# Altium PCB RevisedPGBoard.PcbDoc
Units mm, origin at the board's own origin, x right, y up, seen from the top; angles counter-clockwise.
Board outline 135.38 x 119.51 mm, 4 copper layers (Top Layer, GND Plane, PWR Plane, Bottom Layer), stack 0.603 mm thick; 132 components, 103 nets, 537 pads, 118 vias.
Unrouted connection lines stored in the file: 11.
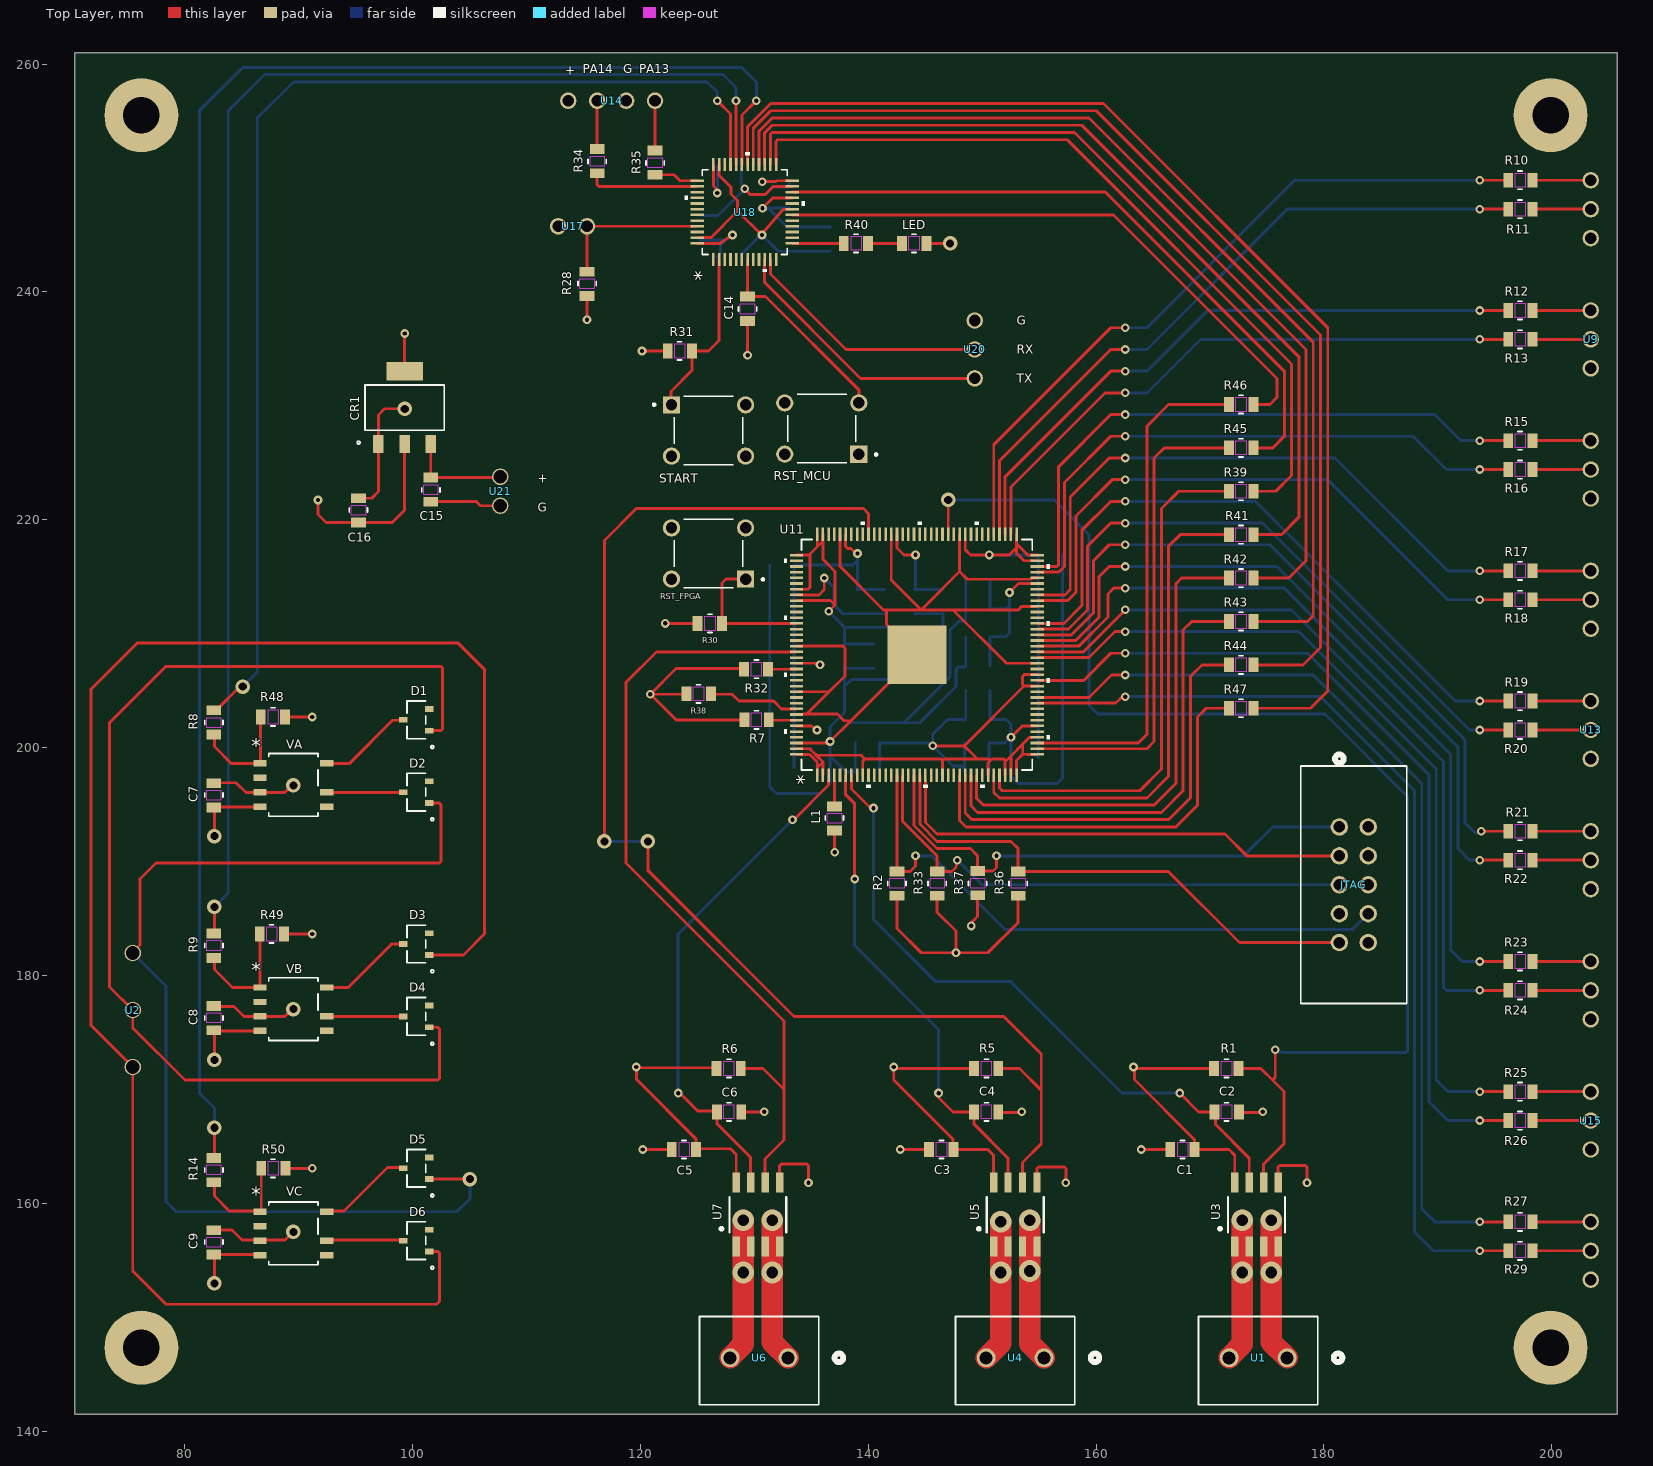
[diagram p0: Top Layer view]
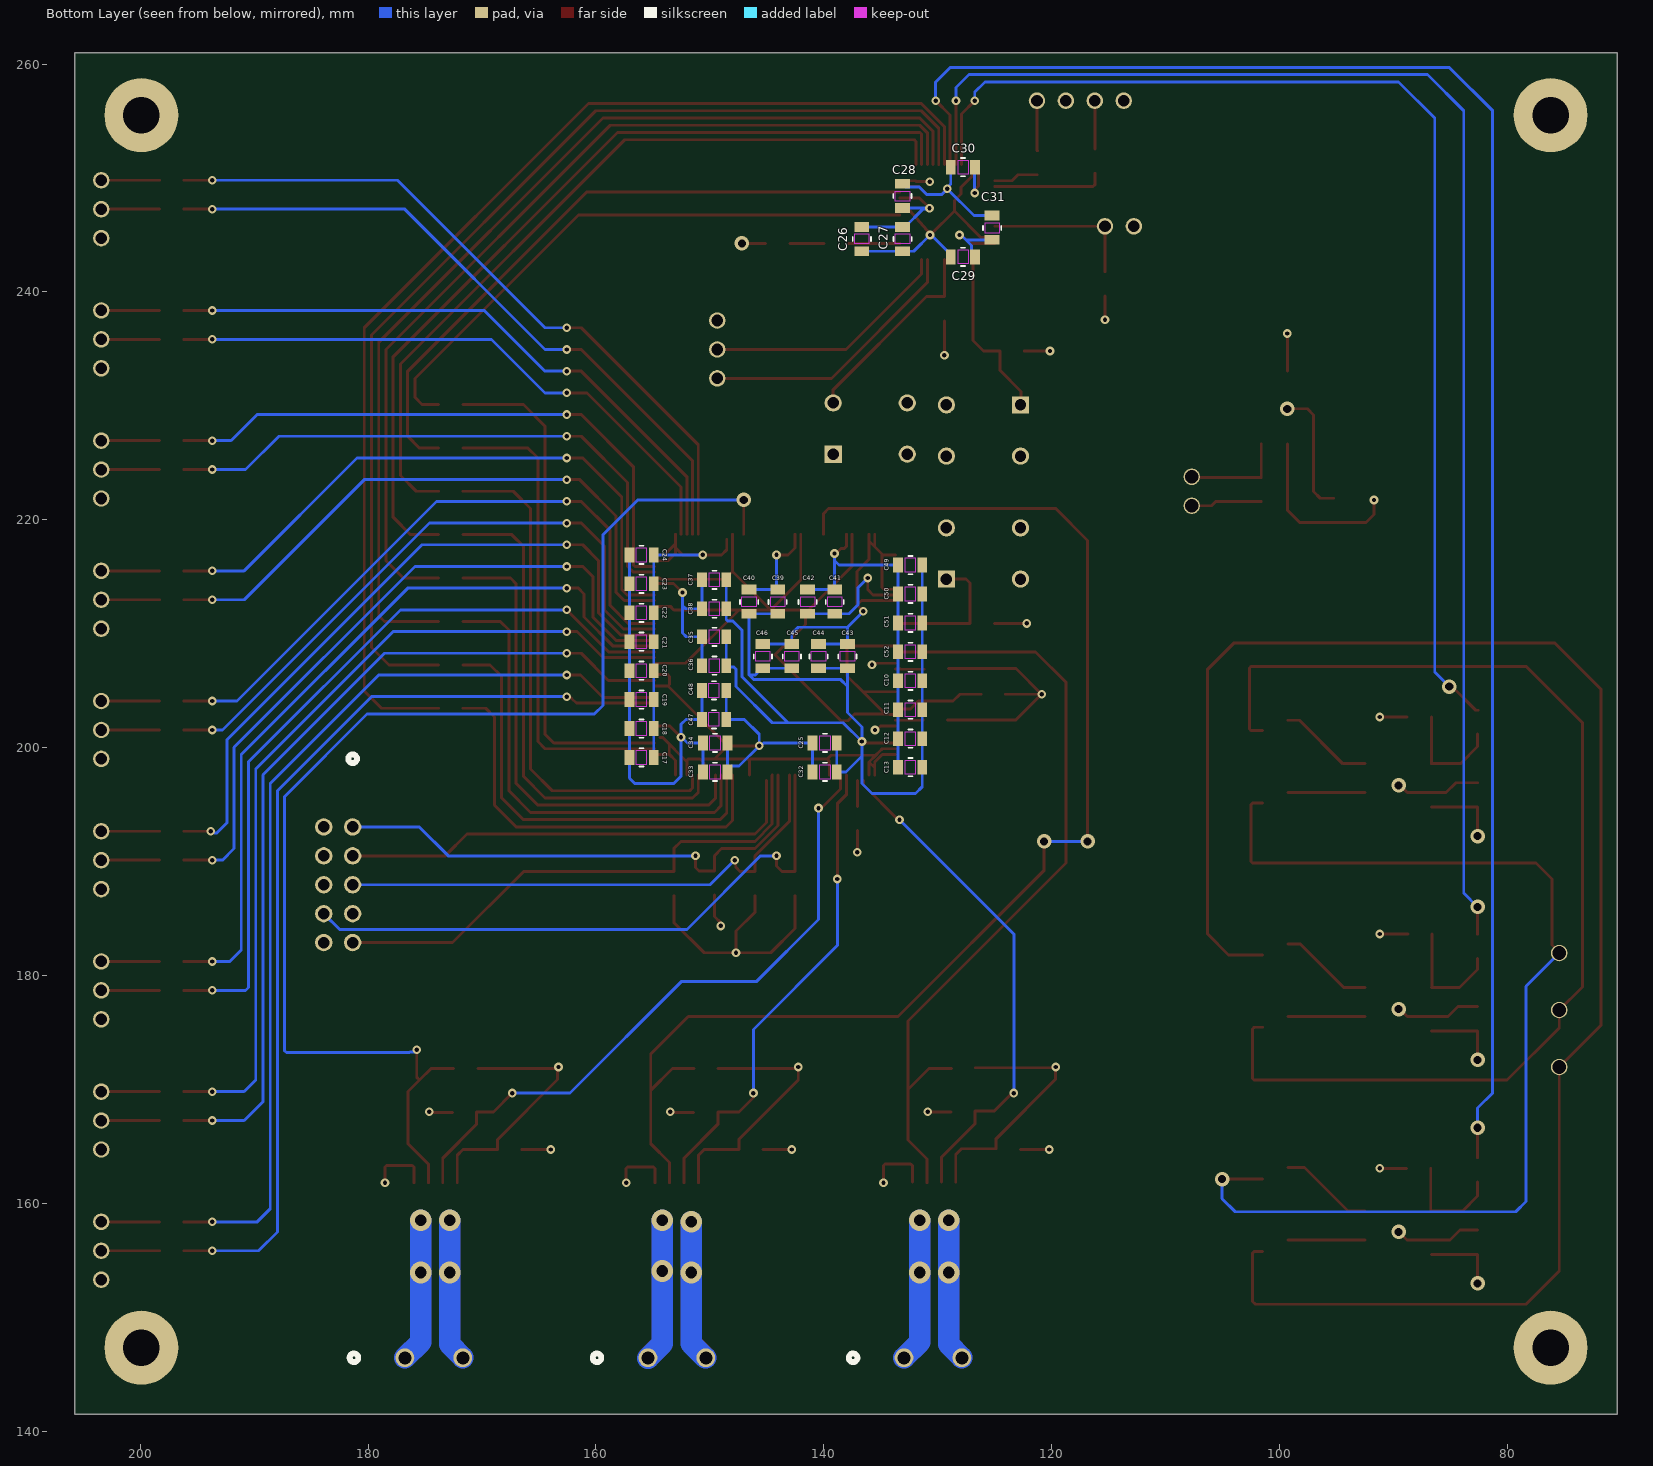
[diagram p1: Bottom Layer view, seen from below]
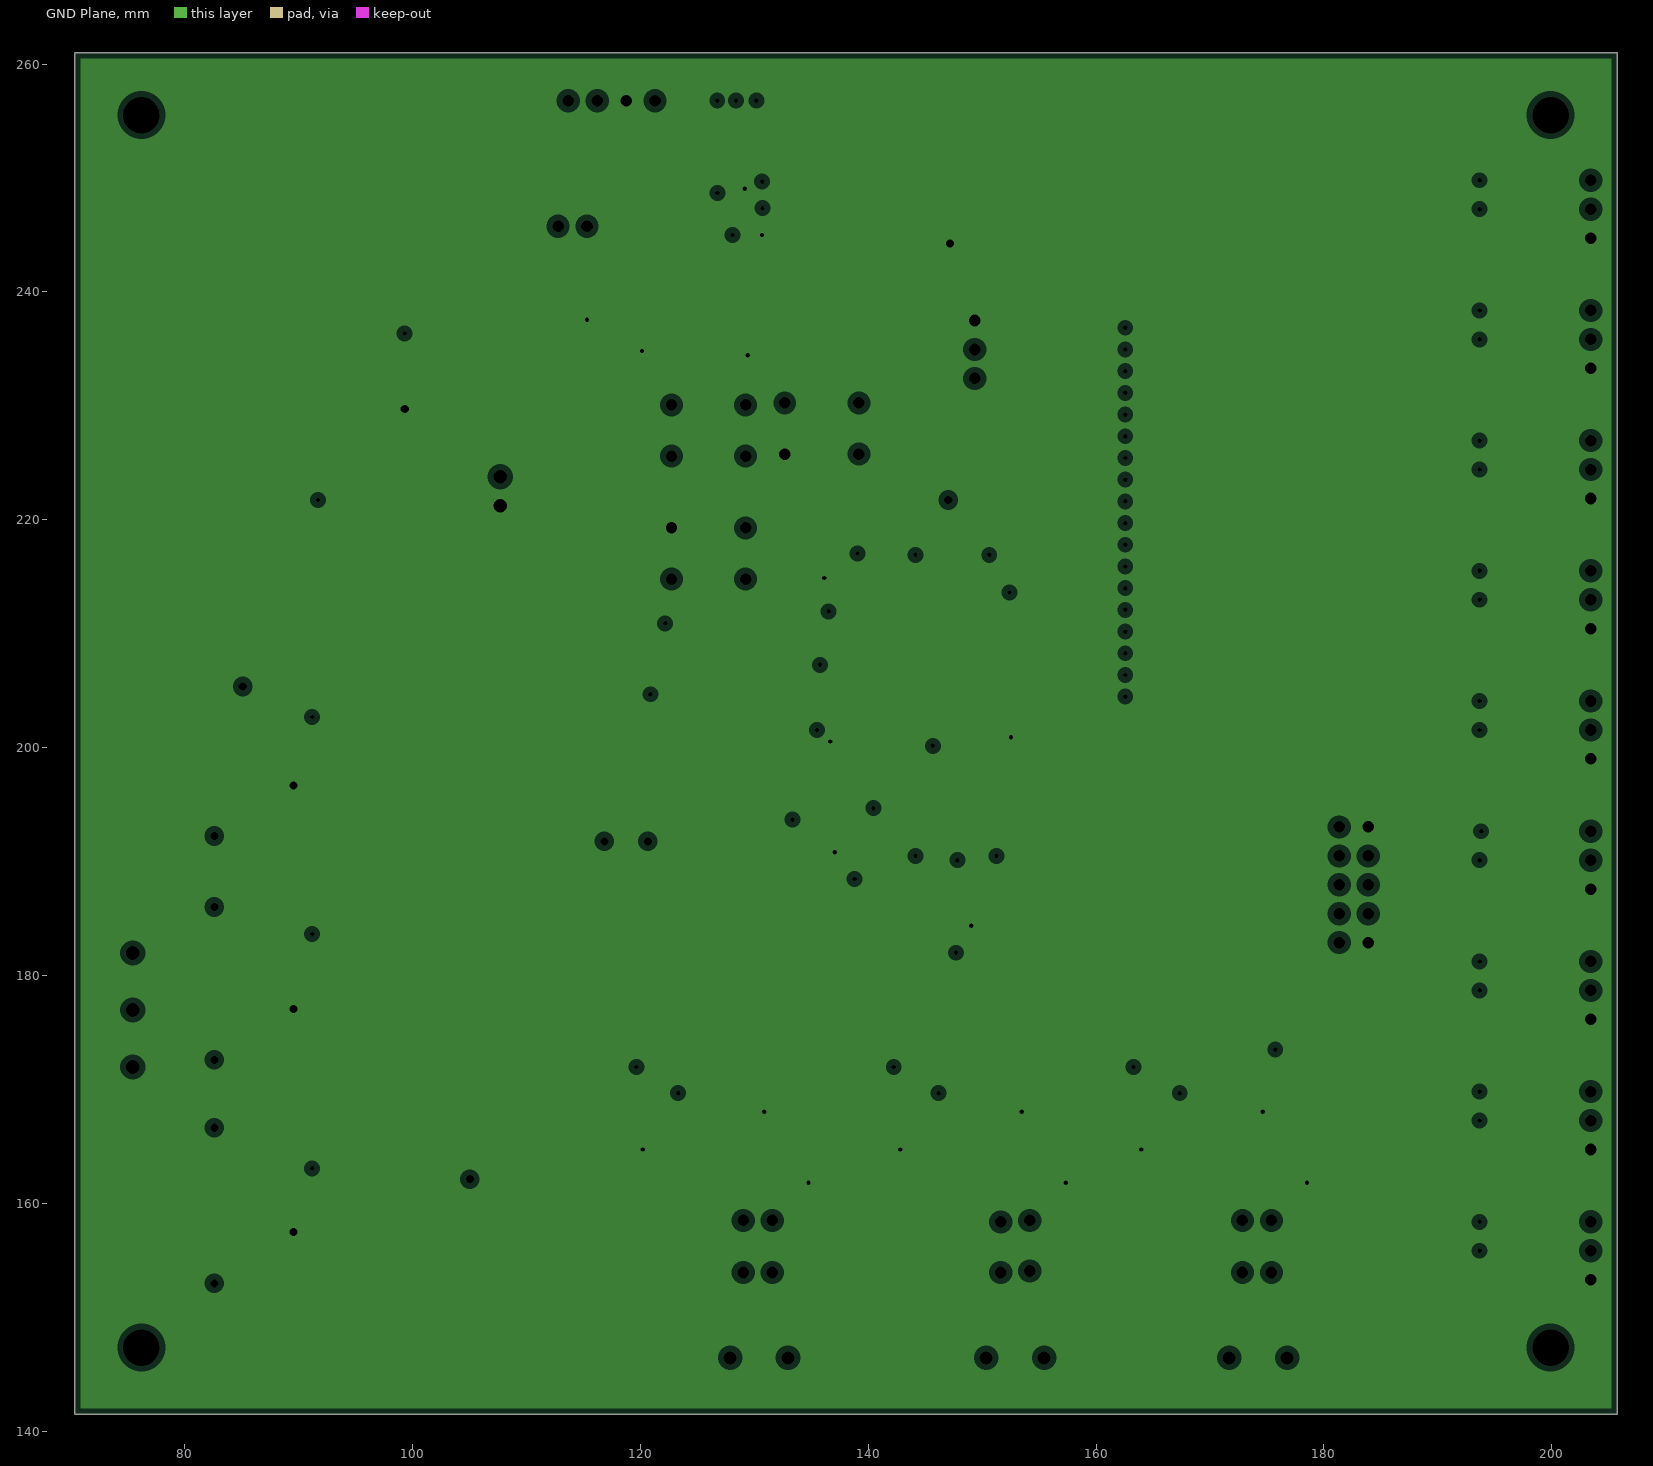
[diagram p2: GND Plane, clearances drawn from the general rule]
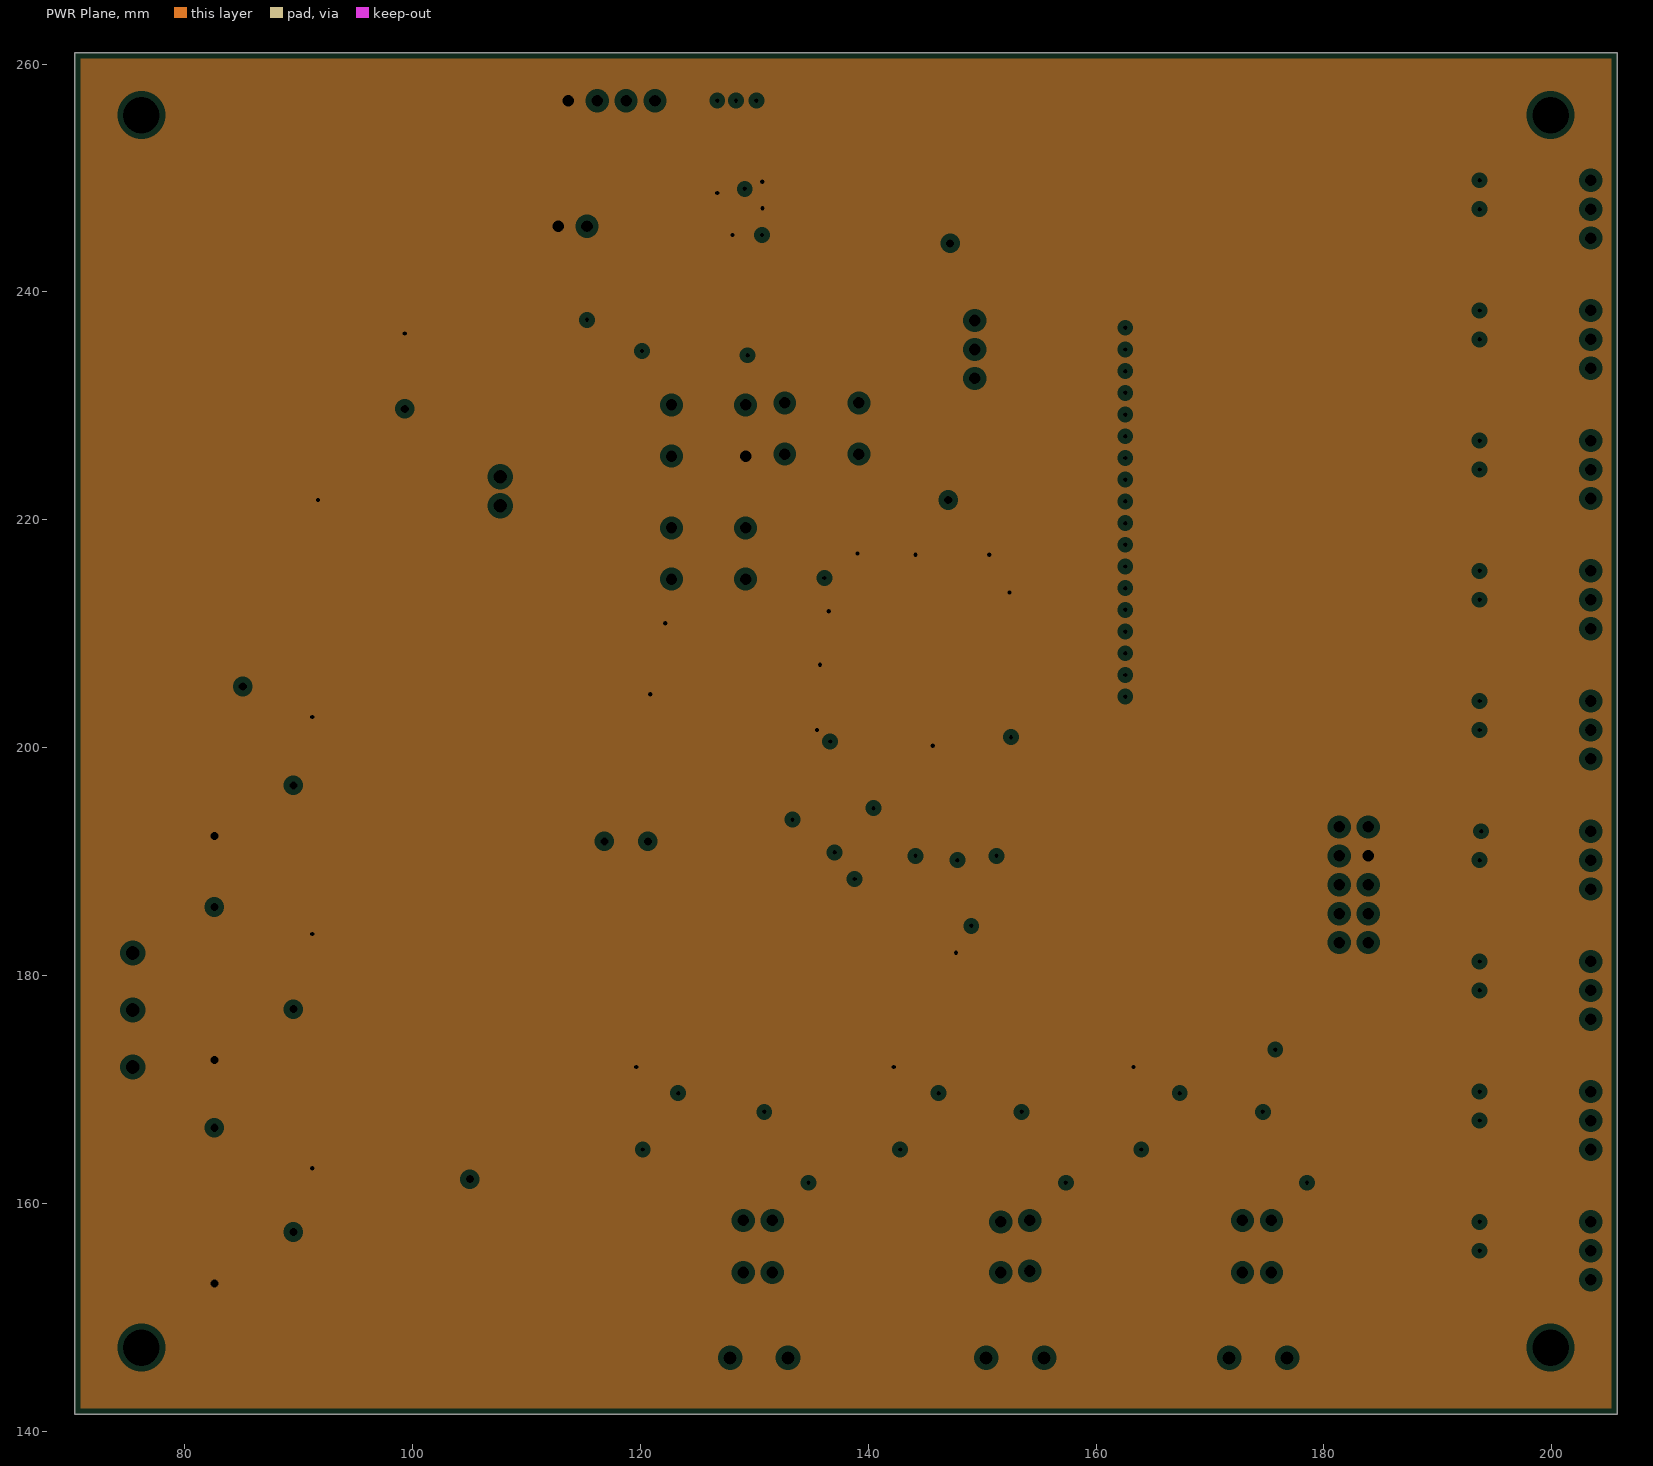
[diagram p3: PWR Plane, clearances drawn from the general rule]
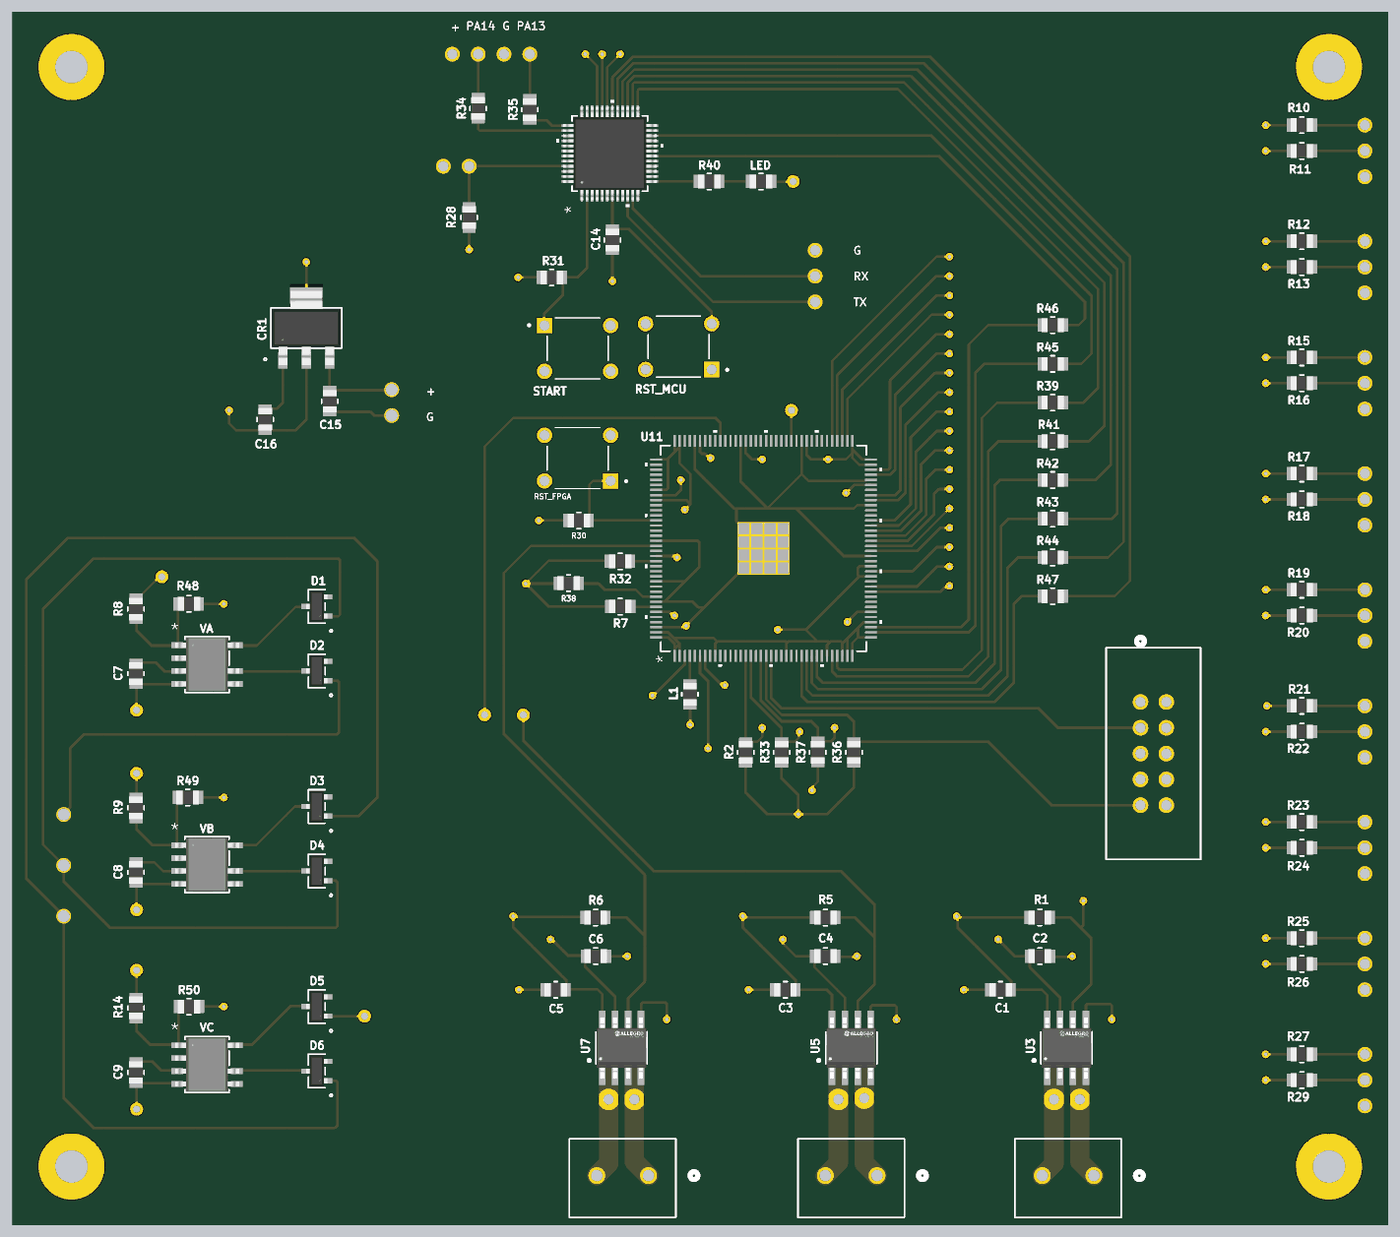
[diagram p4: 3D render of the assembled board from above, using the file's embedded part models]
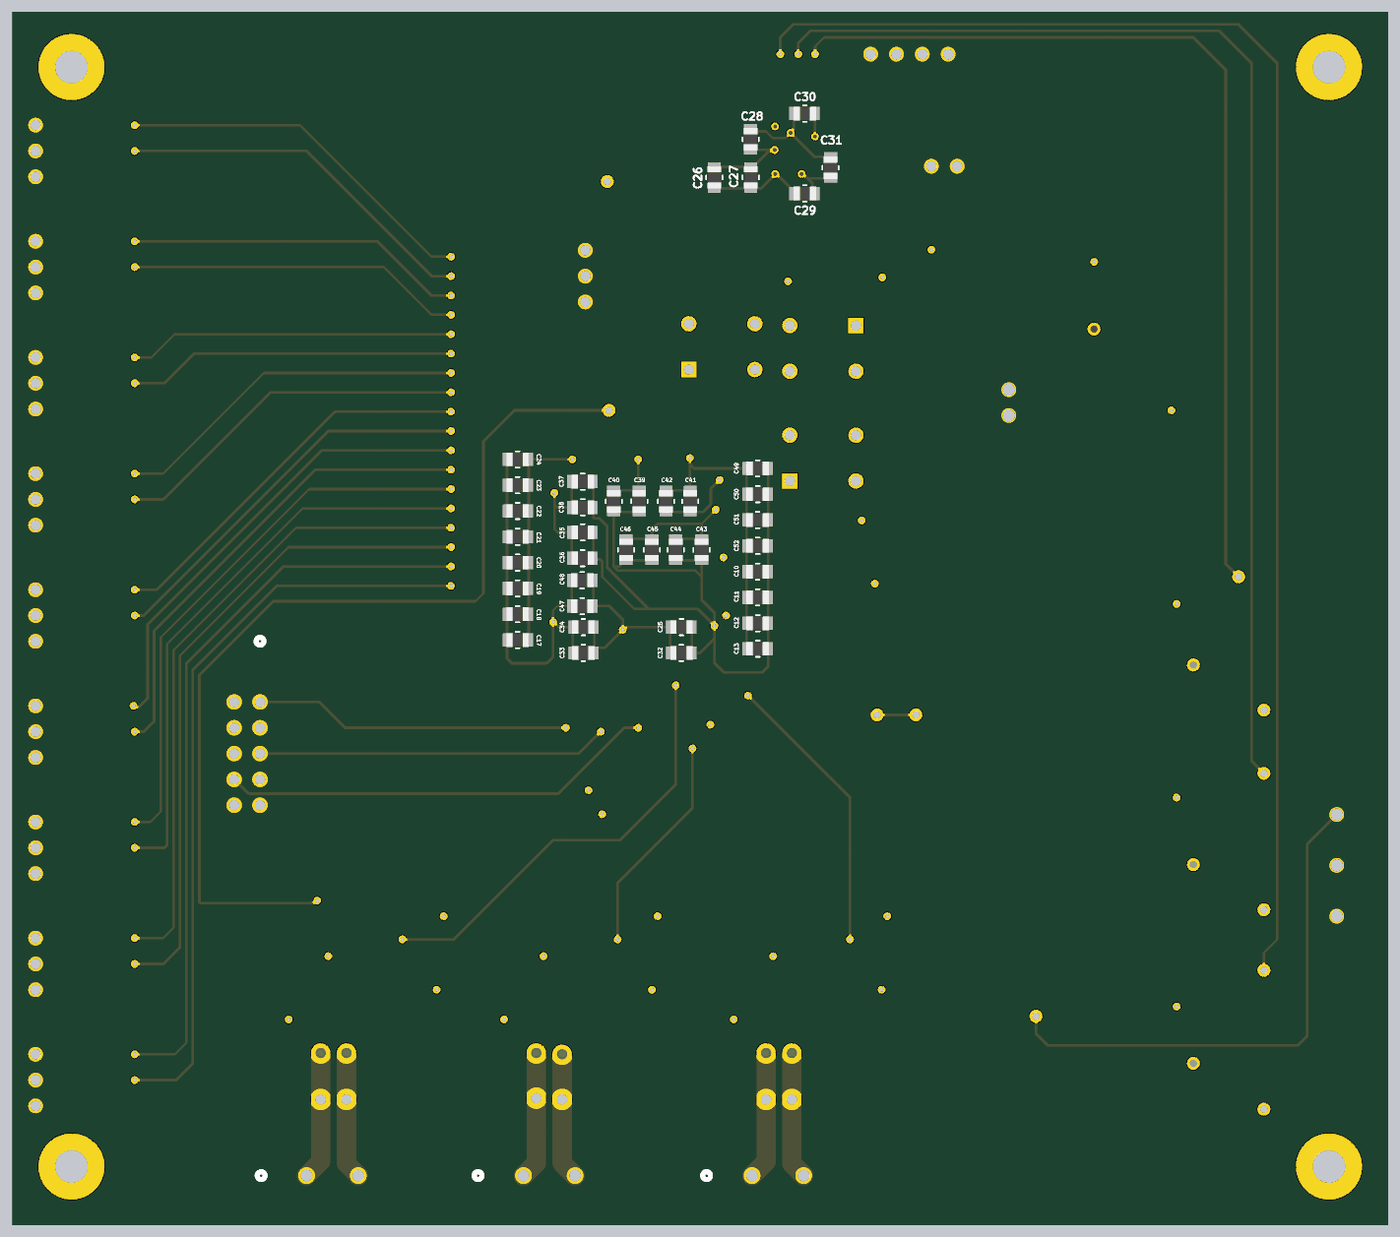
[diagram p5: 3D render of the assembled board from below, using the file's embedded part models]

## Layer stack, top to bottom
Top Solder: solder mask 0.0102, Solder Resist, Dk 3.5
Top Layer: signal copper 0.0356
Dielectric 2: prepreg 0.0711, PP-006, Dk 4.1
GND Plane: plane copper 0.035, net GND
Dielectric 1: dielectric 0.32, FR-4, Dk 4.8
PWR Plane: plane copper 0.035, net 3.3V
Dielectric 3: prepreg 0.0711, PP-006, Dk 4.1
Bottom Layer: signal copper 0.0356
Bottom Solder: solder mask 0.0102, Solder Resist, Dk 3.5

## Board outline
70.358,260.985 205.74,260.985 205.74,141.478 70.358,141.478

## Design rules (kind name [scope] priority, off if disabled: settings)
Clearance [All] p1: gap=0.127 ignorepadtopadclearanceinfootprint=FALSE
HoleSize [All] p1: absolutevalues=TRUE maxlimit=3.2 minlimit=0.025 maxpercent=80.000 minpercent=20.000
PlaneClearance [All] p1: clearance=0.508
PlaneConnect [All] p1: planeconnectstyle=Relief reliefexpansion=0.508 reliefentries=4 reliefconductorwidth=0.254 reliefairgap=0.254
PolygonConnect [All] p1: connectstyle=Relief reliefconductorwidth=0.254 reliefentries=4 polygonreliefangle="90 Angle" airgapwidth=0.254
RoutingVias [All] p1: holewidth=0.711 width=1.27 viastyle="Through Hole" minholewidth=0.254 minwidth=0.305 maxholewidth=6.35 maxwidth=6.477
SolderMaskExpansion [All] p1: expansion=0.102 istentingtop=FALSE
SupplyNets "Schematic Supply Nets" [InNet('GND')] p1: voltage=0.000
SupplyNets "Schematic Supply Nets_3" [InNet('5V')] p2: voltage=0.000
SupplyNets "Schematic Supply Nets_2" [InNet('3.3V')] p3: voltage=0.000
Width [All] p1: maxlimit=12.7 minlimit=0.127 preferedwidth=0.254
27 further rules are at their usual default settings.

## Components (designator, comment, footprint, x,y, rotation, side; value= is the part's Value field where it differs from the comment)
C1 "0.1u" RESISTOR1 167.604,164.719 r180 top
C2 "4.7n" RESISTOR1 171.45,168.021 r0 top
C3 "0.1u" RESISTOR1 146.431,164.719 r180 top
C4 "4.7n" RESISTOR1 150.368,168.021 r180 top
C5 "0.1u" RESISTOR1 123.839,164.719 r180 top
C6 "4.7n" RESISTOR1 127.762,168.021 r0 top
C7 "0.1u" RESISTOR1 82.55,195.834 r270 top
C8 "0.1u" RESISTOR1 82.55,176.276 r270 top
C9 "0.1u" RESISTOR1 82.55,156.591 r270 top
C10 "0.1u" Resistor1 132.397,205.867 r0 bottom
C11 "0.1u" Resistor1 132.397,203.327 r0 bottom
C12 "0.1u" Resistor1 132.397,200.787 r0 bottom
C13 "1u" Resistor1 132.397,198.278 r0 bottom
C14 "0.1u" RESISTOR1 129.409,238.506 r90 top
C15 "1u" RESISTOR1 101.6,222.631 r90 top
C16 "1u" RESISTOR1 95.25,220.853 r270 top
C17 "1u" Resistor1 156.017,199.136 r180 bottom
C18 "1u" Resistor1 156.017,201.676 r180 bottom
C19 "0.1u" Resistor1 156.017,204.216 r180 bottom
C20 "0.1u" Resistor1 156.017,206.756 r180 bottom
C21 "0.1u" Resistor1 156.017,209.296 r180 bottom
C22 "0.1u" Resistor1 156.017,211.836 r180 bottom
C23 "0.1u" Resistor1 156.017,214.376 r180 bottom
C24 "0.1u" Resistor1 156.017,216.916 r180 bottom
C25 "0.1u" Resistor1 139.898,200.406 r0 bottom
C26 "0.1u" Resistor1 136.665,244.665 r270 bottom
C27 "1u" Resistor1 133.082,244.665 r270 bottom
C28 "0.1u" Resistor1 133.096,248.412 r90 bottom
C29 "4.7u" Resistor1 127.762,243.078 r0 bottom
C30 "0.1u" Resistor1 127.762,250.952 r0 bottom
C31 "0.1u" Resistor1 125.222,245.618 r90 bottom
C32 "1u" Resistor1 139.898,197.866 r0 bottom
C33 "0.1u" Resistor1 149.55,197.866 r180 bottom
C34 "1u" Resistor1 149.55,200.406 r180 bottom
C35 "0.1u" Resistor1 149.606,209.729 r0 bottom
C36 "1u" Resistor1 149.606,207.189 r0 bottom
C37 "0.1u" Resistor1 149.606,214.732 r0 bottom
C38 "1u" Resistor1 149.606,212.192 r0 bottom
C39 "0.1u" Resistor1 144.049,212.788 r90 bottom
C40 "1u" Resistor1 146.558,212.788 r90 bottom
C41 "0.1u" Resistor1 139.036,212.788 r90 bottom
C42 "1u" Resistor1 141.42,212.788 r90 bottom
C43 "0.1u" Resistor1 137.922,208.009 r90 bottom
C44 "1u" Resistor1 140.462,208.009 r90 bottom
C45 "0.1u" Resistor1 142.809,208.009 r90 bottom
C46 "1u" Resistor1 145.349,208.009 r90 bottom
C47 "0.1u" Resistor1 149.657,202.477 r180 bottom
C48 "1u" Resistor1 149.657,205.017 r180 bottom
C49 "0.1u" Resistor1 132.397,216.027 r0 bottom
C50 "0.1u" Resistor1 132.397,213.487 r0 bottom
C51 "0.1u" Resistor1 132.397,210.947 r0 bottom
C52 "0.1u" Resistor1 132.397,208.407 r0 bottom
CR1 "VoltageReg" VOLTAGEREG1 100.062,228.092 r270 top
D1 "Diode" DIODE1 100.33,202.438 r90 top
D2 "Diode" DIODE1 100.33,196.088 r90 top
D3 "Diode" DIODE1 100.33,182.753 r90 top
D4 "Diode" DIODE1 100.33,176.403 r90 top
D5 "Diode" DIODE1 100.33,163.068 r90 top
D6 "Diode" DIODE1 100.33,156.718 r90 top
JTAG "JTAG" JTAG 181.356,193.04 r270 top
L1 "Ferrite Bead" RESISTOR1 137.033,193.802 r270 top
LED "LED" RESISTOR1 144.018,244.264 r0 top
R1 "100k" RESISTOR1 171.45,171.831 r180 top
R2 "10k" RESISTOR1 142.522,188.087 r270 top
R5 "100k" RESISTOR1 150.368,171.831 r180 top
R6 "100k" RESISTOR1 127.762,171.831 r180 top
R7 "10k" RESISTOR1 130.175,202.438 r0 top
R8 "22" RESISTOR1 82.55,202.184 r90 top
R9 "22" RESISTOR1 82.55,182.626 r270 top
R10 "330" RESISTOR1 197.231,249.809 r0 top
R11 "330" RESISTOR1 197.231,247.269 r0 top
R12 "330" RESISTOR1 197.231,238.379 r0 top
R13 "330" RESISTOR1 197.231,235.839 r0 top
R14 "22" RESISTOR1 82.55,162.941 r270 top
R15 "330" RESISTOR1 197.231,226.949 r0 top
R16 "330" RESISTOR1 197.231,224.409 r0 top
R17 "330" RESISTOR1 197.231,215.519 r0 top
R18 "330" RESISTOR1 197.231,212.979 r0 top
R19 "330" RESISTOR1 197.231,204.089 r0 top
R20 "330" RESISTOR1 197.231,201.549 r0 top
R21 "330" RESISTOR1 197.231,192.659 r0 top
R22 "330" RESISTOR1 197.231,190.119 r0 top
R23 "330" RESISTOR1 197.231,181.229 r0 top
R24 "330" RESISTOR1 197.231,178.689 r0 top
R25 "330" RESISTOR1 197.231,169.799 r0 top
R26 "330" RESISTOR1 197.231,167.259 r0 top
R27 "330" RESISTOR1 197.231,158.369 r0 top
R28 "4.7k" RESISTOR1 115.316,240.728 r270 top
R29 "330" RESISTOR1 197.231,155.829 r0 top
R30 "1k" Resistor1 126.111,210.903 r180 top
R31 "4.7k" RESISTOR1 123.444,234.823 r0 top
R32 "10k" RESISTOR1 130.175,206.883 r180 top
R33 "10k" RESISTOR1 146.05,188.087 r270 top
R34 "22" Resistor1 116.205,251.46 r90 top
R35 "22" Resistor1 121.285,251.333 r90 top
R36 "10k" RESISTOR1 153.162,188.087 r270 top
R37 "1k" RESISTOR1 149.606,188.087 r90 top
R38 "10k" RESISTOR1 125.095,204.724 r0 top
R39 "22" RESISTOR1 172.72,222.504 r0 top
R40 "330" RESISTOR1 138.938,244.264 r180 top
R41 "22" RESISTOR1 172.72,218.694 r0 top
R42 "22" RESISTOR1 172.72,214.884 r0 top
R43 "22" RESISTOR1 172.72,211.074 r0 top
R44 "22" RESISTOR1 172.72,207.264 r0 top
R45 "22" RESISTOR1 172.72,226.314 r0 top
R46 "22" Resistor1 172.72,230.124 r0 top
R47 "22" Resistor1 172.72,203.454 r0 top
R48 "10k" Resistor1 87.757,202.692 r180 top
R49 "10k" Resistor1 87.63,183.642 r0 top
R50 "10k" Resistor1 87.757,163.068 r0 top
RST_FPGA "Button" Button 125.984,217.043 r180 top
RST_MCU "Button" BUTTON 135.924,228.009 r180 top
START "Button" BUTTON 125.984,227.838 r0 top
U1 "Terminal Block - CS" "TERMINAL BLOCK - CS" 176.772,146.431 r180 top
U2 "Terminal Block - VS" "Terminal Block - VS" 73.939,184.785 r270 top
U3 "Current Sign" CURRENTSIGN4 174.081,159.004 r90 top
U4 "Terminal Block - CS" "TERMINAL BLOCK - CS" 155.436,146.431 r180 top
U5 "Current Sign" CURRENTSIGN4 152.908,159.004 r90 top
U6 "Terminal Block - CS" "TERMINAL BLOCK - CS" 132.957,146.431 r180 top
U7 "Current Sign" CURRENTSIGN4 130.316,159.004 r90 top
U9 "FPGA Output" "FPGA OUTPUT" 201.93,255.168 r270 top
U11 "FPGA" FPGA2 144.272,208.153 r90 top
U13 "FPGA Output" "FPGA OUTPUT" 201.93,220.878 r270 top
U14 "4Pin Output" "4Pin Output" 121.285,256.794 r180 top
U15 "FPGA Output" "FPGA OUTPUT" 201.93,186.588 r270 top
U17 "2Pin Jumper" "2Pin Jumper" 112.776,245.765 r0 top
U18 "MCU" MCU2 129.159,247.015 r90 top
U20 "UART" UART 150.851,229.591 r90 top
U21 "Input" Input 106.197,226.593 r270 top
VA "ZeroCross" ZEROCROSS1 89.535,196.723 r0 top
VB "ZeroCross" ZEROCROSS1 89.535,177.038 r0 top
VC "ZeroCross" ZEROCROSS1 89.535,157.353 r0 top

## Footprints (in the part's own frame and the unit in brackets; to place one, negate y for a bottom-side part, rotate by r counter-clockwise, add the part's x,y. Pads: shape width x height; smd on the part's side, far side on the other; paste and mask are expansions set on the pad)
"2Pin Jumper" [mil]
  round 57 hole 40.16 paste-99999 mask+0: 1(0,0) 2(100,0)
"4Pin Output" [mil]
  round 57 hole 40.16 paste-99999 mask+0: 1(0,0) 2(100,0) 3(200,0) 4(300,0)
Button [mm] "SW_TS02-66-60-BK-100-LCR-D"
  rect 1.508x1.508 / inner round 1.508 / far side rect 1.508x1.508 hole 1: 1(-3.25,2.25)
  round 1.508 hole 1: 2(3.25,2.25) 3(-3.25,-2.25) 4(3.25,-2.25)
  silkscreen extent -4.87,-3 3,3
BUTTON [mm] "SW_TS02-66-60-BK-100-LCR-D"
  rect 1.508x1.508 / inner round 1.508 / far side rect 1.508x1.508 hole 1: 1(-3.25,2.25)
  round 1.508 hole 1: 2(3.25,2.25) 3(-3.25,-2.25) 4(3.25,-2.25)
  silkscreen extent -4.87,-3 3,3
CURRENTSIGN4 [mm]
  rect 1.75x0.65 smd paste+0 mask+0: 1(-2.8,1.905) 2(-2.8,0.635) 3(-2.8,-0.635) 4(-2.8,-1.905) 5(2.8,-1.905) 6(2.8,-0.635) 7(2.8,0.635) 8(2.8,1.905)
  silkscreen extent -1.55,-2.5 1.55,3.32, body extent -3.77,-2.6 3.77,2.6, height 0.25
DIODE1 [mil]
  rect 20x30 smd paste+0 mask+0: 1(-37.4,-45) 2(37.4,-45) 3(0,45)
  silkscreen extent -99,-60 65,33, body extent -60,-41 60,41, height 46
FPGA2 [mil]
  rect 45.5x9 smd paste+0 mask+0: 1(-416.25,344.49) 2(-416.25,324.8) 3(-416.25,305.12) 4(-416.25,285.43) 5(-416.25,265.75) 6(-416.25,246.06) 7(-416.25,226.38) 8(-416.25,206.69) 9(-416.25,187.01) 10(-416.25,167.32) 11(-416.25,147.64) 12(-416.25,127.95) 13(-416.25,108.27) 14(-416.25,88.58) 15(-416.25,68.9) 16(-416.25,49.21) 17(-416.25,29.53) 18(-416.25,9.84) 19(-416.25,-9.84) 20(-416.25,-29.53) 21(-416.25,-49.21) 22(-416.25,-68.9) 23(-416.25,-88.58) 24(-416.25,-108.27) 25(-416.25,-127.95) 26(-416.25,-147.64) 27(-416.25,-167.32) 28(-416.25,-187.01) 29(-416.25,-206.69) 30(-416.25,-226.38) 31(-416.25,-246.06) 32(-416.25,-265.75) 33(-416.25,-285.43) 34(-416.25,-305.12) 35(-416.25,-324.8) 36(-416.25,-344.49) 73(416.25,-344.49) 74(416.25,-324.8) 75(416.25,-305.12) 76(416.25,-285.43) 77(416.25,-265.75) 78(416.25,-246.06) 79(416.25,-226.38) 80(416.25,-206.69) 81(416.25,-187.01) 82(416.25,-167.32) 83(416.25,-147.64) 84(416.25,-127.95) 85(416.25,-108.27) 86(416.25,-88.58) 87(416.25,-68.9) 88(416.25,-49.21) 89(416.25,-29.53) 90(416.25,-9.84) 91(416.25,9.84) 92(416.25,29.53) 93(416.25,49.21) 94(416.25,68.9) 95(416.25,88.58) 96(416.25,108.27) 97(416.25,127.95) 98(416.25,147.64) 99(416.25,167.32) 100(416.25,187.01) 101(416.25,206.69) 102(416.25,226.38) 103(416.25,246.06) 104(416.25,265.75) 105(416.25,285.43) 106(416.25,305.12) 107(416.25,324.8) 108(416.25,344.49)
  rect 9x45.5 smd paste+0 mask+0: 37(-344.49,-416.25) 38(-324.8,-416.25) 39(-305.12,-416.25) 40(-285.43,-416.25) 41(-265.75,-416.25) 42(-246.06,-416.25) 43(-226.38,-416.25) 44(-206.69,-416.25) 45(-187.01,-416.25) 46(-167.32,-416.25) 47(-147.64,-416.25) 48(-127.95,-416.25) 49(-108.27,-416.25) 50(-88.58,-416.25) 51(-68.9,-416.25) 52(-49.21,-416.25) 53(-29.53,-416.25) 54(-9.84,-416.25) 55(9.84,-416.25) 56(29.53,-416.25) 57(49.21,-416.25) 58(68.9,-416.25) 59(88.58,-416.25) 60(108.27,-416.25) 61(127.95,-416.25) 62(147.64,-416.25) 63(167.32,-416.25) 64(187.01,-416.25) 65(206.69,-416.25) 66(226.38,-416.25) 67(246.06,-416.25) 68(265.75,-416.25) 69(285.43,-416.25) 70(305.12,-416.25) 71(324.8,-416.25) 72(344.49,-416.25) 109(344.49,416.25) 110(324.8,416.25) 111(305.12,416.25) 112(285.43,416.25) 113(265.75,416.25) 114(246.06,416.25) 115(226.38,416.25) 116(206.69,416.25) 117(187.01,416.25) 118(167.32,416.25) 119(147.64,416.25) 120(127.95,416.25) 121(108.27,416.25) 122(88.58,416.25) 123(68.9,416.25) 124(49.21,416.25) 125(29.53,416.25) 126(9.84,416.25) 127(-9.84,416.25) 128(-29.53,416.25) 129(-49.21,416.25) 130(-68.9,416.25) 131(-88.58,416.25) 132(-108.27,416.25) 133(-127.95,416.25) 134(-147.64,416.25) 135(-167.32,416.25) 136(-187.01,416.25) 137(-206.69,416.25) 138(-226.38,416.25) 139(-246.06,416.25) 140(-265.75,416.25) 141(-285.43,416.25) 142(-305.12,416.25) 143(-324.8,416.25) 144(-344.49,416.25)
  rect 203x203 smd paste-101 mask+0: EPAD(0,0)
  silkscreen extent -459,-459 459,459, body extent 0,0 10,10, height 10
"FPGA OUTPUT" [mil]
  round 57 hole 40.16 paste-99999 mask+0: 1(211,59) 2(311,59) 3(411,59) 4(661,59) 5(761,59) 6(861,59) 7(1111,59) 8(1211,59) 9(1311,59)
Input [mil] "Input block for Voltage Reg"
  round 57 hole 47 paste-99999 mask+0: 1(111,59) 2(211,59)
JTAG [mil]
  round 60 hole 40 paste-99999 mask+0: 1(0,0) 2(0,100) 3(100,0) 4(100,100) 5(200,0) 6(200,100) 7(300,0) 8(300,100) 9(400,0) 10(400,100)
  silkscreen extent -250,-133 610,233
MCU2 [mil]
  rect 45.5x9 smd paste+0 mask+0: 1(-164.25,108.3) 2(-164.25,88.6) 3(-164.25,68.91) 4(-164.25,49.23) 5(-164.25,29.53) 6(-164.25,9.85) 7(-164.25,-9.85) 8(-164.25,-29.53) 9(-164.25,-49.23) 10(-164.25,-68.91) 11(-164.25,-88.6) 12(-164.25,-108.3) 25(164.25,-108.3) 26(164.25,-88.6) 27(164.25,-68.91) 28(164.25,-49.23) 29(164.25,-29.53) 30(164.25,-9.85) 31(164.25,9.85) 32(164.25,29.53) 33(164.25,49.23) 34(164.25,68.91) 35(164.25,88.6) 36(164.25,108.3)
  rect 9x45.5 smd paste+0 mask+0: 13(-108.3,-164.25) 14(-88.6,-164.25) 15(-68.92,-164.25) 16(-49.23,-164.25) 17(-29.53,-164.25) 18(-9.84,-164.25) 19(9.84,-164.25) 20(29.53,-164.25) 21(49.23,-164.25) 22(68.92,-164.25) 23(88.6,-164.25) 24(108.3,-164.25) 37(108.3,164.25) 38(88.6,164.25) 39(68.92,164.25) 40(49.23,164.25) 41(29.53,164.25) 42(9.84,164.25) 43(-9.84,164.25) 44(-29.53,164.25) 45(-49.23,164.25) 46(-68.92,164.25) 47(-88.6,164.25) 48(-108.3,164.25)
  silkscreen extent -207,-207 207,207, body extent -181,-181 181,181, height 63
RESISTOR1 [mil]
  rect 34x51 smd paste+0 mask+0: 1(-41,0) 2(43,0)
  Top Layer keep-out region: -17.5,-24.5 -17.5,24.5 17.5,24.5 17.5,-24.5
  silkscreen extent -7,-32 7,32, body extent -44,-26 44,26, height 26
Resistor1 [mil]
  rect 34x51 smd paste+0 mask+0: 1(-41,0) 2(43,0)
  Top Layer keep-out region: -17.5,-24.5 -17.5,24.5 17.5,24.5 17.5,-24.5
  silkscreen extent -7,-32 7,32, body extent -44,-26 44,26, height 26
"TERMINAL BLOCK - CS" [mil]
  round 65 / inner round 60 / far side round 65 hole 45 paste-99999 mask+0: 1(0,0) 2(200,0)
  silkscreen extent -191,-143 306,162
"Terminal Block - VS" [mil] "8719"
  round 57 hole 47 paste-99999 mask+0: 1(111,59) 2(308,59) 3(505,59)
UART [mil]
  round 57 hole 40.16 paste-99999 mask+0: 1(111,59) 2(211,59) 3(311,59)
VOLTAGEREG1 [mil]
  rect 63x36 smd paste+0 mask+0: 1(57,-120.55) 2(57,-30) 3(57,60.55)
  rect 63x126 smd paste+0 mask+0: 4(-195,-30)
  silkscreen extent -147,-194 57,107, body extent -213,-162 75,102, height 71
ZEROCROSS1 [mil]
  rect 46x22 smd paste+0 mask+0: 1(-115,75) 2(-115,25) 3(-115,-25) 4(-115,-75) 5(115,-75) 6(115,-25) 7(115,75)
  silkscreen extent -86,-108 86,108, body extent -124,-104 124,104, height 65

## Part data
C1 C3 C5 C7 C8 C9 C10 C11 C12 C14 C19 C20 C21 C22 C23 C24 C25 C26 C28 C30 C31 C33 C35 C37 C39 C41 C43 C45 C47 C49 C50 C51 C52: library part Capacitor0.1u, "C0805C104K1RAC7800", Mfr_Name=Murata
C2 C4 C6: library part Capacitor4.7n, "C0805C472K1GEC7800", Mfr_Name=Murata
C13 C15 C16 C17 C18 C27 C32 C34 C36 C38 C40 C42 C44 C46 C48: library part Capacitor1u, "C0805C103J1GEC7800", Mfr_Name=Murata
C29: library part Capacitor4.7u, "C0805C472K1GEC7800", Mfr_Name=Murata
CR1: "LD1117S33TR", Mfr_Name=STMicroelectronics, RefDes=RefDes, Type=Type
D1 D2 D3 D4 D5 D6: Mfr_Name=onsemi, RefDes=RefDes, Type="Diodes - Rectifiers, Single"
JTAG: "JTAG 10 Pin Header"
L1: "BLM21BB050SN1D", Mfr_Name=TDK
R1 R5 R6: library part Resistor100k, "RMCF0805FT100K", Mfr_Name="Stackpole International"
R2 R7 R32 R33 R36 R38 R48 R49 R50: library part Resistor10k, "RMCF0805FT4K70", Mfr_Name="Stackpole International"
R8 R9 R14 R34 R35 R39 R41 R42 R43 R44 R45 R46 R47: library part Resistor22, "RMCF0603JT22R0", Mfr_Name="Stackpole International"
R10 R11 R12 R13 R15 R16 R17 R18 R19 R20 R21 R22 R23 R24 R25 R26 R27 R29 R40: library part Resistor330, "RMCF0805FT330R", Mfr_Name="Stackpole International"
R28 R31: library part Resistor4.7k, "RMCF0805FT4K70", Mfr_Name="Stackpole International"
R30 R37: library part Resistor1k, "RMCF0805FT4K70", Mfr_Name="Stackpole International"
RST_FPGA RST_MCU START: "SW_TS02-66-60-BK-100-LCR-D", Package=None, Availability=Unavailable, MP=TS02-66-60-BK-100-LCR-D, Price=None
U1 U2 U4 U6: "8719"
U3 U5 U7: library part CurrentSign, "ACS71240LLCBTR-010B3"
U11: "10M04SAE144C8G"
U18: "STM32G491CET6"
VA VB VC: "BM1Z003FJ-E2"

## Free pads (board coordinates)
  round 6.5 hole 3.2: 1(76.2,147.32) 1(76.2,255.524) 1(199.898,147.32) 1(199.898,255.524)

## Via types
v1: diameter 0.762, hole 0.381, Top Layer to Bottom Layer, 91 vias
v2: diameter 1.27, hole 0.711, Top Layer to Bottom Layer, 15 vias
v3: diameter 1.905, hole 1.016, Top Layer to Bottom Layer, 12 vias

## Nets (pads, with @x,y where several pads share a name; then routed paths per layer and width w, separated by ;. In a path a pad name is that pad's centre, name@x,y a point inside that pad or via, vN(x,y) a via of type N, cw(c..) or ccw(c..) an arc to the next point about the centre after c; other vN are vias at no path point)
3.3V: C1.1 C3.1 C5.1 C7.2 C8.2 C9.2 C10.2 C11.2 C12.2 C13.2 C16.2 C17.2 C18.2 C19.2 C20.2 C21.2 C22.2 C23.2 C24.2 C25.2 C26.1 C27.1 C28.1 C29.1 C30.1 C31.1 C32.2 C33.2 C34.2 C35.2 C36.2 C37.2 C38.2 C39.2 C40.2 C41.2 C42.2 C43.2 C44.2 C45.2 C46.2 C47.2 C48.2 C49.2 C50.2 C51.2 C52.2 CR1.2 CR1.4 JTAG.4 R1.2 R2.2 R5.2 R6.2 R7.1 R30.2 R32.2 R33.2 R36.2 R38.1 R48.1 R49.2 R50.2 START.4 U3.8 U5.8 U7.8 U11.1 U11.2 U11.9 U11.23 U11.31 U11.34 U11.35 U11.36 U11.37 U11.40 U11.49 U11.51 U11.67 U11.71 U11.72 U11.73 U11.82 U11.94 U11.103 U11.107 U11.108 U11.109 U11.115 U11.117 U11.128 U11.139 U11.143 U11.144 U14.4 U17.1 U18.21 U18.24 U18.36 U18.48 VA.4 VB.4 VC.4 | length 390.9
  Top Layer w0.254: v2(82.601,152.967) 82.601,155.507 VC.4@86.654,155.507 ; v2(82.601,172.593) 82.601,175.133 VB.4@86.654,175.133 ; v2(82.601,192.238) 82.601,194.778 VA.4@86.654,194.778 ; R49.2 v1(91.186,183.642) ; R48.1 v1(91.186,202.692) ; R50.2 v1(91.186,163.068) ; v1(91.694,221.742) 91.694,220.472 92.405,219.761 C16.2 98.222,219.761 99.3,220.839 CR1.2 ; CR1.4 v1(99.3,236.347) ; v1@119.394,171.897 v1@119.648,171.897 ; v1(122.174,210.903) R30.2 ; R38.1@124.054,204.688 v1(120.879,204.688) ; U18.48 126.943,244.264 127.023,244.264 127.089,244.31 v1(128.078,245.003) ; U18.36 126.408,249.315 126.76,248.963 v1(126.76,248.689) ; R6.2@126.67,171.897 v1@119.648,171.897 ; U7.8@128.411,161.87 128.411,164.277 127.903,164.785 124.88,164.785 124.864,164.802 124.864,165.665 119.648,170.881 v1@119.648,171.897 ; R32.2@129.057,206.938 123.129,206.938 v1(120.879,204.688) ; R7.1 123.129,202.438 v1(120.879,204.688) ; v1(130.683,249.682) 131.863,249.682 131.947,249.766 U18.24 ; v1(130.725,247.362) 131.628,248.265 U18.21 ; U11.144 134.861,199.403 135.522,198.742 135.522,198.25 ; U11.143 134.869,199.903 135.115,199.657 135.444,199.328 ; U11.139 135.018,201.903 135.372,201.549 v1(135.509,201.549) ; U11.128 135.487,207.403 135.626,207.264 v1(135.763,207.264) ; U11.117 136.698,212.903 137.082,212.52 ; U11.115 134.725,213.903 134.874,214.052 134.874,216.982 ; U11.109 134.795,216.903 136.022,218.13 ; U11.1 135.522,198.25 ; 135.522,217.63 U11.108 ; U11.2 136.022,198.75 ; U11.107 136.022,218.13 ; v1(136.525,211.963) 137.082,212.52 ; U11.103 138.022,217.656 138.202,217.476 138.494,217.476 138.928,217.043 v1(139.065,217.043) ; U11.9 139.522,198.809 139.703,198.99 ; v1@142.24,171.831 142.24,170.815 147.456,165.599 147.456,164.735 C3.1 150.495,164.719 151.003,164.211 U5.8 ; v1@142.367,171.831 R5.2 ; R2.2 142.522,184.122 144.653,181.991 v1(147.701,181.991) ; U11.94 142.522,217.523 143.129,216.916 v1(144.145,216.916) ; v1(145.669,200.152) 148.431,200.152 ; R33.2 146.05,185.547 147.701,183.896 v1(147.701,181.991) ; U11.23 146.522,198.888 ; U11.82@148.522,218.275 148.522,217.365 148.971,216.916 152.387,216.916 153.022,217.551 ; U11.31 150.522,198.655 150.732,198.865 ; U11.34 152.022,198.892 ; v1(152.4,213.614) 153.189,214.403 U11.67 ; U11.35 152.522,199.258 ; U11.36 153.022,198.869 153.57,199.417 ; U11.73 153.022,217.89 ; R36.2 153.162,184.658 150.495,181.991 v1(147.701,181.991) ; U11.40@154.394,200.903 154.167,200.903 153.57,200.306 ; U11.37 153.959,199.403 153.57,199.417 ; U11.49 153.682,205.403 ; U11.51 153.698,206.403 153.549,206.254 153.549,205.536 153.682,205.403 ; U11.71 153.675,216.403 153.022,217.056 153.022,217.551 ; U11.72 154.009,216.903 153.022,217.89 ; v1@163.286,171.704 163.369,171.621 163.369,170.859 168.629,165.599 168.629,164.735 C1.1 171.668,164.719 172.176,164.211 U3.8 ; v1(163.286,171.958) 163.413,171.831 R1.2 ; 135.444,199.328 136.022,198.75 ; 135.444,199.328 139.364,199.328 139.703,198.99 ; 135.522,198.25 136.022,198.75 ; 136.022,218.13 136.022,216.53 137.082,215.47 137.082,212.52 ; 139.703,198.99 146.42,198.99 146.522,198.888 ; 146.522,198.888 146.554,198.856 146.703,199.005 149.578,199.005 ; 148.431,200.152 153.682,205.403 ; 148.431,200.152 149.197,199.386 149.578,199.005 ; 149.578,199.005 150.593,199.005 150.732,198.865 ; 150.732,198.865 150.876,199.009 151.905,199.009 152.054,198.86 152.054,198.79 152.522,199.258 ; 152.522,199.258 153.57,200.306 ; 153.022,217.551 153.022,217.89 ; 153.57,199.417 153.57,200.306
  Bottom Layer w0.254: C31.1 127.478,244.577 ; C29.1 127.025,243.383 127.025,244.088 v1@127.941,245.003 ; C30.1 126.76,250.913 v1(126.76,248.689) ; v1@127.966,245.003 v1(128.078,245.003) ; C28.1 133.087,247.362 v1(130.725,247.362) 130.822,247.265 131.309,247.265 132.867,245.707 C27.1 C26.1 ; C13.2 C12.2 C11.2 C10.2 C52.2 C51.2 C50.2 C49.2 138.674,216.027 139.065,216.418 ; v1(136.525,211.963) 137.922,210.566 ; v1(139.065,217.043) 139.065,216.418 ; C44.2 C43.2 137.922,210.566 ; C32.2 C25.2 145.278,200.406 145.532,200.152 v1(145.669,200.152) ; C42.2 C41.2 139.065,213.909 139.065,216.418 ; v1(144.145,216.916) 144.145,213.977 C39.2 146.549,213.881 C40.2@146.558,213.89 ; C46.2 C45.2 142.809,209.997 142.24,210.566 137.922,210.566 ; C33.2 C33.2@148.457,198.082 ; C34.2 C33.2@148.457,198.082 ; C48.2 C47.2 146.978,202.477 145.669,201.168 v1(145.669,200.152) ; v1(150.622,216.916) C24.2 C23.2 C22.2 C21.2 C20.2 C19.2 C18.2 C17.2 ; C36.2 C35.2 152.071,209.729 152.4,210.058 152.4,212.471 ; C37.2 C38.2 152.121,212.192 152.4,212.471 ; v1(152.4,213.614) 152.4,212.471 ; v1(145.669,200.152) 147.434,198.387 148.153,198.387 C33.2@148.457,198.082
  other v1: 119.648,171.958 142.24,171.958
5V: C15.2 CR1.3 U21.1 | length 9
  Top Layer w0.254: CR1.3 C15.2 U21.1@107.696,223.723
GND: C1.2 C2.2 C3.2 C4.1 C5.2 C6.2 C7.1 C8.1 C9.1 C10.1 C11.1 C12.1 C13.1 C14.1 C15.1 C16.1 C17.1 C18.1 C19.1 C20.1 C21.1 C22.1 C23.1 C24.1 C25.1 C26.2 C27.2 C28.2 C29.2 C30.2 C31.2 C32.1 C33.1 C34.1 C35.1 C36.1 C37.1 C38.1 C39.1 C40.1 C41.1 C42.1 C43.1 C44.1 C45.1 C46.1 C47.1 C48.1 C49.1 C50.1 C51.1 C52.1 CR1.1 JTAG.2 JTAG.10 L1.2 LED.2 R28.2 R31.1 R37.1 RST_FPGA.4 RST_MCU.2 U3.5 U5.5 U7.5 U9.3 U9.6 U9.9 U11.42 U11.53 U11.63 U11.68 U11.83 U11.95 U11.104 U11.116 U11.125 U11.133 U11.137 U11.142 U11.EPAD U13.3 U13.6 U13.9 U14.2 U15.3 U15.6 U15.9 U18.19 U18.23 U18.35 U18.47 U20.3 U21.2 VA.3 VB.3 VC.3 | length 368.5
  Top Layer w0.254: C9.1@82.601,157.641 84.149,157.641 85.013,156.777 88.801,156.777 89.504,157.48 v2(89.535,157.48) ; C8.1@82.601,177.267 84.336,177.267 85.199,176.403 VB.3 86.654,176.403 88.773,176.403 89.408,177.038 v2(89.535,177.038) v2@89.575,177.038 ; C7.1@82.601,196.912 84.502,196.912 85.366,196.048 86.654,196.048 88.773,196.048 89.408,196.683 v2(89.535,196.683) v2@89.575,196.683 ; C16.1 96.418,221.894 97,222.476 CR1.1 97,229.207 97.536,229.743 v2(99.314,229.743) ; C15.1 105.62,221.59 105.976,221.234 U21.2 U21.2@107.817,221.234 ; v1(115.316,237.553) R28.2 ; v1(120.142,234.823) R31.1 ; v1(120.207,164.719) C5.2 ; U18.47 126.199,244.764 128.534,247.1 ; U18.35 126.908,250.242 127.961,249.19 127.961,248.594 128.534,248.021 128.534,247.1 ; C6.2@128.843,168.021 C6.2 v1(130.875,168.021) ; v1(129.159,249.047) 129.667,248.539 130.937,248.539 131.664,249.266 U18.23 ; v1(129.409,234.442) C14.1 ; v1(130.672,245.001) 130.633,245.001 v1@130.601,245.034 ; U7.5@132.221,161.87 132.221,163.3 132.37,163.449 134.612,163.449 134.761,163.3 v1@134.761,161.87 ; U18.19 132.587,247.259 132.507,247.18 130.616,245.051 v1@130.601,245.034 ; U11.142 136.522,200.403 v1(136.652,200.533) 138.476,202.357 ; U11.137 133.712,202.916 134.242,202.916 134.265,202.938 134.606,202.938 ; U11.133 136.469,204.903 ; U11.125 137.815,208.903 137.963,208.754 137.963,206.295 136.52,204.852 134.606,202.938 ; U11.116 135.679,213.403 136.144,213.868 v1(136.144,214.884) ; v1(137.054,190.805) L1.2@137.054,192.71 ; U11.104 137.522,215.919 141.351,212.09 141.605,212.09 ; U11.95 142.022,214.721 144.653,212.09 ; v1(142.799,164.719) C3.2 ; LED.2@145.11,244.239 v2@147.193,244.239 ; LED.2 LED.2@145.123,244.252 ; U11.83 148.022,215.459 ; v1(149.041,184.347) 149.041,184.622 149.606,185.187 R37.1 ; C4.1@151.435,167.955 v1@153.467,167.955 ; v1(152.527,200.914) 153.516,201.903 U11.42 ; U5.5 154.813,163.046 154.962,163.195 157.204,163.195 157.353,163.046 v1@157.353,161.804 ; U11.53 152.134,207.403 147.447,212.09 ; U11.63 153.475,212.403 153.162,212.09 147.447,212.09 ; U11.68 154.407,214.903 154.288,214.784 148.697,214.784 148.022,215.459 ; v1(163.972,164.719) C1.2 ; C2.2@172.608,167.955 v1@174.64,167.955 ; U3.5 175.986,163.173 176.135,163.322 178.377,163.322 178.526,163.173 v1@178.526,161.804 ; 128.534,247.1 v1@130.601,245.034 ; 134.606,202.938 137.295,202.938 137.876,202.357 138.476,202.357 ; 138.476,202.357 U11.EPAD 141.605,210.82 141.605,212.09 ; 141.605,212.09 144.653,212.09 ; 144.653,212.09 147.447,212.09 ; 144.653,212.09 148.022,215.459
  Bottom Layer w0.254: C31.2 126.822,246.71 v1(129.159,249.047) ; C29.2 128.854,243.294 130.562,245.001 v1(130.672,245.001) 132.1,243.573 C27.2 C26.2 ; C30.2 128.854,249.489 129.159,249.184 v1(129.159,249.047) ; C49.1 C50.1 C51.1 C52.1 C10.1 C11.1 C12.1 131.356,196.558 131.953,195.961 135.763,195.961 136.652,196.85 136.652,199.263 ; C28.2 132.791,249.199 131.597,249.199 130.937,248.539 129.667,248.539 v1(129.159,249.047) ; v1(136.144,214.884) 137.01,214.018 137.01,212.516 137.779,211.747 C41.1 C42.1 ; C25.1 C32.1 138.049,197.866 136.652,199.263 ; C44.1 C43.1 137.922,205.359 ; C45.1 C46.1 145.565,206.968 145.87,206.663 145.87,206.524 146.019,206.375 146.558,206.375 ; C39.1 C40.1@146.549,211.747 ; C40.1 146.558,206.375 ; C35.1 C36.1 148.458,207.083 147.901,207.083 147.701,206.883 147.701,205.359 144.526,202.184 143.129,202.184 ; C37.1 C38.1 148.565,211.248 148.416,211.099 147.98,211.099 147.193,210.312 147.193,206.248 143.129,202.184 ; C33.1 C34.1 151.957,200.406 152.465,200.914 v1(152.527,200.914) ; C48.1 C47.1 152.107,202.477 152.527,202.057 v1(152.527,200.914) ; C24.1 C23.1 C22.1 C21.1 C20.1 C19.1 C18.1 C17.1 157.058,197.317 156.591,196.85 153.162,196.85 152.527,197.485 v1(152.527,200.914) ; 136.652,199.263 v1(136.652,200.533) ; v1(136.652,200.533) 138.303,202.184 143.129,202.184 ; v1(136.652,200.533) 136.652,201.803 137.922,203.073 137.922,205.359 ; 137.922,205.359 138.557,205.994 146.177,205.994 146.558,206.375
  other v1: 134.761,161.798 157.353,161.798 178.526,161.798 153.467,168.021 174.64,168.021
  other v2: 147.193,244.264
NetC2_1: C2.1 U3.7 U11.7 | length 58.1
  Top Layer w0.254: U11.7 138.522,196.377 140.208,194.691 v1(140.462,194.691) ; v1(167.35,169.672) 169.001,168.021 170.474,168.021 170.474,166.929 173.446,163.957 U3.7
  Bottom Layer w0.254: v1(140.462,194.691) 140.462,184.912 145.923,179.451 152.509,179.451 162.288,169.672 v1(167.35,169.672)
NetC4_2: C4.2 U5.7 U11.6 | length 42.4
  Top Layer w0.254: U11.6 138.022,195.861 138.811,195.072 v1(138.811,188.468) ; 146.177,169.291 147.447,168.021 C4.2 149.301,168.021 149.301,166.929 152.273,163.957 U5.7
  Bottom Layer w0.254: v1(138.811,188.468) 138.811,182.626 146.177,175.26 v1(146.177,169.672)
NetC6_1: C6.1 U7.7 U11.3 | length 44.6
  Top Layer w0.254: v1@123.317,169.799 125.029,168.087 126.709,168.087 126.709,166.995 129.681,164.023 U7.7@129.681,161.87 ; v1(133.35,193.675) 133.477,193.675 136.522,196.72 U11.3@136.522,197.129
  Bottom Layer w0.254: v1(123.317,169.672) 123.317,183.642 v1(133.35,193.675)
NetC14_2: C14.2 RST_MCU.3 U18.7 | length 17.6
  Top Layer w0.254: U18.7 C14.2 130.988,239.598 139.174,231.412 RST_MCU.3
NetD1_1: D1.1 D4.1 U2.2 | length 99.7
  Top Layer w0.254: D4.1 102.213,175.453 102.362,175.304 102.362,170.964 102.213,170.815 80.01,170.815 75.438,175.387 U2.2 73.406,178.994 73.406,202.184 78.359,207.137 102.467,207.137 102.616,206.988 102.616,201.637 102.467,201.488 D1.1
NetD1_3: D1.3 VA.7 | length 8.3
  Top Layer w0.254: VA.7@92.496,198.588 94.432,198.588 98.242,202.398 D1.3@99.238,202.398
NetD2_1: D2.1 D5.1 U2.1 | length 95.7
  Top Layer w0.254: U2.1 75.438,182.048 76.073,182.683 76.073,188.468 77.47,189.865 102.34,189.865 102.489,190.014 102.489,194.989 102.34,195.138 D2.1 ; D5.1 v2(105.029,162.118)
  Bottom Layer w0.254: U2.1 78.359,179.045 78.359,160.147 79.248,159.258 103.886,159.258 105.029,160.401 v2(105.029,162.118)
NetD2_3: D2.3 VA.6 | length 6.7
  Top Layer w0.254: VA.6@92.496,196.048 D2.3@99.238,196.048
NetD3_1: D3.1 D6.1 U2.3 | length 152
  Top Layer w0.254: D6.1 102.213,155.768 102.362,155.619 102.362,151.384 102.108,151.13 78.359,151.13 75.438,154.051 U2.3 71.755,175.641 71.755,205.105 75.819,209.169 104.013,209.169 106.299,206.883 106.299,183.642 104.46,181.803 D3.1
NetD3_3: D3.3 VB.7 | length 8.3
  Top Layer w0.254: VB.7@92.496,178.943 94.354,178.943 98.164,182.753 D3.3@99.238,182.753
NetD4_3: D4.3 VB.6 | length 6.7
  Top Layer w0.254: VB.6@92.496,176.403 D4.3@99.238,176.403
NetD5_3: D5.3 VC.7 | length 8.3
  Top Layer w0.254: VC.7@92.496,159.317 93.988,159.317 97.798,163.127 D5.3@99.238,163.127
NetD6_3: D6.3 VC.6 | length 6.7
  Top Layer w0.254: VC.6@92.496,156.777 D6.3@99.238,156.777
NetJTAG_1: JTAG.1 R37.2 U11.18 | length 46.4
  Top Layer w0.254: U11.18 144.022,193.163 146.05,191.135 148.971,191.135 149.606,190.5 R37.2 150.952,189.179 151.257,189.484 v1(151.257,190.5)
  Bottom Layer w0.254: v1(151.257,190.5) 172.974,190.5 175.514,193.04 JTAG.1
NetJTAG_3: JTAG.3 U11.20 | length 41.2
  Top Layer w0.254: U11.20@145.035,197.129 145.035,193.42 146.05,192.405 171.323,192.405 173.228,190.5 JTAG.3
NetJTAG_5: JTAG.5 U11.16
NetJTAG_8: JTAG.8 U11.15
NetJTAG_9: JTAG.9 U11.19
NetL1_1: L1.1 U11.4 | length 2.3
  Top Layer w0.254: L1.1 U11.4@137.033,197.129
NetLED_1: LED.1 R40.1 | length 3
  Top Layer w0.254: R40.1 LED.1
NetR1: R1.1 U3.6 U11.85 | length 113.3
  Top Layer w0.254: U11.85@147.022,218.726 v2(147.022,221.742) ; R1.1 174.462,171.831 175.478,170.815 ; U3.6 174.716,163.449 176.494,165.227 176.494,169.799 175.478,170.815 ; v1(175.732,173.482) 175.732,171.069 175.478,170.815
  Bottom Layer w0.254: v2(147.022,221.742) 156.337,221.742 159.385,218.694 159.385,203.708 160.147,202.946 180.086,202.946 187.325,195.707 187.325,173.377 187.176,173.228 176.389,173.228 176.329,173.288 175.926,173.288 v1(175.732,173.482)
NetR5: R5.1 U5.6 U11.99 | length 116.7
  Top Layer w0.254: v2@116.84,191.897 116.84,218.186 119.634,220.98 139.573,220.98 140.022,220.531 U11.99 ; v2(120.65,191.77) 120.65,189.23 133.477,176.403 151.892,176.403 155.194,173.101 155.194,169.926 ; R5.1 153.289,171.831 155.194,169.926 ; U5.6 153.543,163.576 155.194,165.227 155.194,169.926
  Bottom Layer w0.254: v2(116.84,191.77) v2(120.65,191.77)
NetR6: R6.1 U7.6 U11.126 | length 71
  Top Layer w0.254: R6.1 130.763,171.831 132.602,169.992 ; U7.6 130.951,163.896 132.602,165.547 132.602,169.992 ; U11.126 121.408,208.403 118.745,205.74 118.745,189.865 132.602,176.008 132.602,169.992
NetR7_2: R7.2 U11.138 | length 2.4
  Top Layer w0.254: R7.2 131.302,202.403 U11.138
NetR8: R8.1 R48.2 VA.1 | length 9.9
  Top Layer w0.254: R8.1@82.601,201.179 82.601,200.092 84.105,198.588 86.654,198.588 86.665,198.599 R48.2
NetR8_2: R8.2 U18.33 | length 102.8
  Top Layer w0.254: R8.2 82.766,203.276 84.849,205.359 v2(85.09,205.359) ; v1(126.746,256.794) 127.909,255.631 U18.33
  Bottom Layer w0.254: v2(85.09,205.359) 86.36,206.629 86.36,255.27 89.535,258.445 125.857,258.445 126.746,257.556 v1(126.746,256.794)
NetR9: R9.1 U18.32 | length 125.9
  Top Layer w0.254: R9.1@82.601,183.617 v2(82.601,186.015) ; v1(128.397,256.794) 128.403,256.788 128.403,251.193 U18.32
  Bottom Layer w0.254: v2(82.601,186.015) 83.82,187.234 83.82,255.905 86.995,259.08 127.254,259.08 128.397,257.937 v1(128.397,256.794)
NetR9_2: R9.2 R49.1 VB.1 | length 10.4
  Top Layer w0.254: R9.2@82.601,181.483 82.601,180.525 84.183,178.943 VB.1 ; R49.1 86.589,179.008 VB.1@86.654,178.943
NetR10: R10.1 U11.77 | length 62.6
  Top Layer w0.254: U11.77 151.022,226.587 161.29,236.855 v1(162.56,236.855) ; v1(193.675,249.809) R10.1
  Bottom Layer w0.254: v1(162.56,236.855) 164.465,236.855 177.419,249.809 v1(193.675,249.809)
NetR10_2: R10.2 U9.1 | length 5.1
  Top Layer w0.254: R10.2 U9.1
NetR11: R11.1 U11.76 | length 60.3
  Top Layer w0.254: U11.76 151.522,225.182 161.29,234.95 v1(162.56,234.95) ; v1(193.675,247.269) R11.1
  Bottom Layer w0.254: v1(162.56,234.95) 164.465,234.95 176.784,247.269 v1(193.675,247.269)
NetR11_2: R11.2 U9.2 | length 5.1
  Top Layer w0.254: R11.2 U9.2
NetR12: R12.1 U11.75 | length 55.3
  Top Layer w0.254: U11.75 152.022,223.777 161.29,233.045 v1(162.56,233.045) ; v1(193.675,238.379) R12.1
  Bottom Layer w0.254: v1(162.56,233.045) 164.465,233.045 169.799,238.379 v1(193.675,238.379)
NetR12_2: R12.2 U9.4 | length 5.1
  Top Layer w0.254: R12.2 U9.4
NetR13: R13.1 U11.74 | length 53.2
  Top Layer w0.254: U11.74 152.522,222.88 160.782,231.14 v1(162.56,231.14) ; v1(193.675,235.839) R13.1
  Bottom Layer w0.254: v1(162.56,231.14) 164.465,231.14 169.164,235.839 v1(193.675,235.839)
NetR13_2: R13.2 U9.5 | length 5.1
  Top Layer w0.254: R13.2 U9.5
NetR14: R14.1 U18.31 | length 151.2
  Top Layer w0.254: R14.1@82.601,163.991 v2(82.601,166.632) ; U18.31 128.909,255.528 v1(130.175,256.794)
  Bottom Layer w0.254: v2(82.601,166.632) 82.601,168.351 81.28,169.672 81.28,255.905 85.09,259.715 128.905,259.715 130.175,258.445 v1(130.175,256.794)
NetR14_2: R14.2 R50.1 VC.1 | length 9.6
  Top Layer w0.254: R14.2@82.601,161.857 82.601,160.631 83.914,159.317 86.654,159.317 86.716,159.379 R50.1
NetR15: R15.1 U11.70 | length 53.1
  Top Layer w0.254: U11.70 156.569,215.903 156.718,216.052 156.718,224.663 161.29,229.235 v1(162.56,229.235) ; v1(193.675,226.949) R15.1
  Bottom Layer w0.254: v1(162.56,229.235) 189.738,229.235 192.024,226.949 v1(193.675,226.949) v1@193.929,226.949
NetR15_2: R15.2 U9.7 | length 5.1
  Top Layer w0.254: R15.2 U9.7
NetR16: R16.1 U11.69 | length 52.1
  Top Layer w0.254: U11.69 156.729,215.403 157.226,215.9 157.226,223.266 161.29,227.33 v1(162.56,227.33) ; v1(193.675,224.409) R16.1
  Bottom Layer w0.254: v1(162.56,227.33) 187.833,227.33 190.754,224.409 v1(193.675,224.409) v1@193.929,224.409
NetR16_2: R16.2 U9.8 | length 5.1
  Top Layer w0.254: R16.2 U9.8
NetR17: R17.1 U11.65 | length 55.4
  Top Layer w0.254: U11.65 157.269,213.403 157.734,213.868 157.734,221.996 161.163,225.425 v1(162.56,225.425) ; v1(193.675,215.519) R17.1
  Bottom Layer w0.254: v1(162.56,225.425) 180.975,225.425 190.881,215.519 v1(193.675,215.519) v1@193.929,215.519
NetR17_2: R17.2 U13.1 | length 5.1
  Top Layer w0.254: R17.2 U13.1
NetR18: R18.1 U11.64 | length 54.3
  Top Layer w0.254: U11.64 157.509,212.903 158.242,213.636 158.242,220.345 161.417,223.52 v1(162.56,223.52) ; v1(193.675,212.979) R18.1
  Bottom Layer w0.254: v1(162.56,223.52) 180.34,223.52 190.881,212.979 v1(193.675,212.979) v1@193.929,212.979
NetR18_2: R18.2 U13.2 | length 5.1
  Top Layer w0.254: R18.2 U13.2
NetR19: R19.1 U11.60 | length 57.2
  Top Layer w0.254: U11.60 157.182,210.903 158.75,212.471 158.75,219.075 161.29,221.615 v1(162.56,221.615) ; v1(193.675,204.089) R19.1
  Bottom Layer w0.254: v1(162.56,221.615) 173.99,221.615 191.516,204.089 v1(193.675,204.089) v1@193.929,204.089
NetR19_2: R19.2 U13.4 | length 5.1
  Top Layer w0.254: R19.2 U13.4
NetR20: R20.1 U11.59 | length 56.2
  Top Layer w0.254: U11.59 157.571,210.403 159.258,212.09 159.258,217.678 161.29,219.71 v1(162.56,219.71) ; v1(193.675,201.549) R20.1
  Bottom Layer w0.254: v1(162.56,219.71) 174.625,219.71 192.786,201.549 v1(193.675,201.549) v1@193.929,201.549
NetR20_2: R20.2 U13.5 | length 5.1
  Top Layer w0.254: R20.2 U13.5
NetR21: R21.1 U11.58 | length 62.1
  Top Layer w0.254: U11.58 157.833,209.903 159.766,211.836 159.766,216.408 161.163,217.805 v1(162.56,217.805) ; v1(193.802,192.659) R21.1
  Bottom Layer w0.254: v1(162.56,217.805) 175.26,217.805 192.405,200.66 192.405,193.384 193.287,192.501 193.446,192.501 v1(193.802,192.659)
NetR21_2: R21.2 U13.7 | length 5.1
  Top Layer w0.254: R21.2 U13.7
NetR22: R22.1 U11.57 | length 62
  Top Layer w0.254: U11.57 158.222,209.403 160.274,211.455 160.274,215.011 161.163,215.9 v1(162.56,215.9) ; v1(193.675,190.119) R22.1
  Bottom Layer w0.254: v1(162.56,215.9) 175.895,215.9 191.77,200.025 191.77,191.135 192.786,190.119 v1(193.675,190.119)
NetR22_2: R22.2 U13.8 | length 5.1
  Top Layer w0.254: R22.2 U13.8
NetR23: R23.1 U11.56 | length 68.5
  Top Layer w0.254: U11.56 158.484,208.903 161.036,211.455 161.036,213.487 161.544,213.995 v1(162.56,213.995) ; v1(193.675,181.229) R23.1
  Bottom Layer w0.254: v1(162.56,213.995) 176.53,213.995 191.135,199.39 191.135,182.245 192.151,181.229 v1(193.675,181.229) v1@193.929,181.229
NetR23_2: R23.2 U15.1 | length 5.1
  Top Layer w0.254: R23.2 U15.1
NetR24: R24.1 U11.55 | length 68.6
  Top Layer w0.254: U11.55 158.873,208.403 v1(162.56,212.09) ; v1(193.675,178.689) R24.1
  Bottom Layer w0.254: v1(162.56,212.09) 177.165,212.09 190.5,198.755 190.5,178.943 190.754,178.689 v1(193.675,178.689) v1@193.929,178.689
NetR24_2: R24.2 U15.2 | length 5.1
  Top Layer w0.254: R24.2 U15.2
NetR25: R25.1 U11.54 | length 75.3
  Top Layer w0.254: U11.54 159.389,207.903 161.671,210.185 v1(162.56,210.185) ; v1(193.675,169.799) R25.1
  Bottom Layer w0.254: v1(162.56,210.185) 177.8,210.185 189.865,198.12 189.865,170.815 190.881,169.799 v1(193.675,169.799) v1@193.929,169.799
NetR25_2: R25.2 U15.4 | length 5.1
  Top Layer w0.254: R25.2 U15.4
NetR26: R26.1 U11.50 | length 76.4
  Top Layer w0.254: U11.50 158.913,205.903 161.29,208.28 v1(162.56,208.28) ; v1(193.675,167.259) R26.1
  Bottom Layer w0.254: v1(162.56,208.28) 178.562,208.28 189.23,197.612 189.23,168.91 190.881,167.259 v1(193.675,167.259) v1@193.929,167.259
NetR26_2: R26.2 U15.5 | length 5.1
  Top Layer w0.254: R26.2 U15.5
NetR27: R27.1 U11.47 | length 83.9
  Top Layer w0.254: U11.47 159.395,204.403 161.367,206.375 v1(162.56,206.375) ; v1(193.675,158.369) R27.1
  Bottom Layer w0.254: v1(162.56,206.375) 179.07,206.375 188.595,196.85 188.595,159.512 189.738,158.369 v1(193.675,158.369)
NetR27_2: R27.2 U15.7 | length 5.1
  Top Layer w0.254: R27.2 U15.7
NetR28: R28.1 U17.2 U18.45 | length 13.7
  Top Layer w0.254: R28.1 U17.2 U18.45
NetR29: R29.1 U11.46 | length 84.6
  Top Layer w0.254: U11.46 161.718,203.903 162.091,204.276 cw(c162.56,203.806) v1(162.56,204.47) ; v1(193.675,155.829) R29.1
  Bottom Layer w0.254: v1(162.56,204.47) 179.705,204.47 187.96,196.215 187.96,157.48 189.611,155.829 v1(193.675,155.829) v1@193.929,155.829
NetR29_2: R29.2 U15.8 | length 5.1
  Top Layer w0.254: R29.2 U15.8
NetR30: R30.1 RST_FPGA.1 U11.121 | length 12.3
  Top Layer w0.254: RST_FPGA.1 127.508,214.793 127.152,214.437 R30.1 U11.121
NetR31_2: R31.2 START.1 U18.2 | length 15.5
  Top Layer w0.254: START.1@122.682,229.95 122.682,231.267 124.536,233.121 R31.2 125.984,234.823 126.908,235.747 U18.2
NetR32: R32.1 U11.129 | length 2.5
  Top Layer w0.254: R32.1 133.241,206.883 133.261,206.903 U11.129
NetR34: R34.1 U18.38 | length 9.8
  Top Layer w0.254: R34.1 116.205,249.414 116.354,249.266 U18.38
NetR34_2: R34.2 U14.3 | length 4.2
  Top Layer w0.254: R34.2 U14.3
NetR35: R35.1 U18.37 | length 3.9
  Top Layer w0.254: R35.1 122.961,250.292 123.487,249.766 U18.37
NetR35_2: R35.2 U14.1 | length 4.4
  Top Layer w0.254: R35.2@121.252,252.392 R35.2 U14.1
NetR38_2: R38.2 U11.136 | length 8
  Top Layer w0.254: R38.2@126.187,204.688 128.052,204.688 128.651,204.089 131.699,204.089 132.385,203.403 U11.136
NetR39: U18.25 | length 69.2
  Top Layer w0.254: U18.25 131.91,253.216 132.058,253.365 157.48,253.365 177.165,233.68 177.165,223.901 175.768,222.504 173.812,222.504
NetR39_2: R39.1 R39.2 U11.33 | length 45.7
  Top Layer w0.254: U11.33 151.522,196.458 151.765,196.215 163.83,196.215 165.735,198.12 165.735,220.98 167.259,222.504 R39.1
NetR40_2: R40.2 U18.13 | length 4.5
  Top Layer w0.254: U18.13 R40.2
NetR41: U18.26 | length 76
  Top Layer w0.254: U18.26 131.41,253.851 131.558,254 158.115,254 177.8,234.315 177.8,220.218 176.276,218.694 173.812,218.694
NetR41_2: R41.1 R41.2 U11.32 | length 43.8
  Top Layer w0.254: U11.32 151.022,196.069 151.511,195.58 164.465,195.58 166.37,197.485 166.37,217.678 167.386,218.694 R41.1
NetR42: U18.27 | length 82.5
  Top Layer w0.254: U18.27 130.909,253.972 131.572,254.635 158.75,254.635 178.435,234.95 178.435,216.408 176.911,214.884 173.812,214.884
NetR42_2: R42.1 R42.2 U11.29 | length 43
  Top Layer w0.254: U11.29 149.522,195.537 150.114,194.945 165.1,194.945 167.005,196.85 167.005,214.376 167.513,214.884 R42.1
NetR43: U18.28 | length 89.7
  Top Layer w0.254: U18.28 130.409,254.107 131.572,255.27 159.385,255.27 179.07,235.585 179.07,211.582 178.562,211.074 173.812,211.074
NetR43_2: R43.1 R43.2 U11.28 | length 40.8
  Top Layer w0.254: U11.28 149.022,194.894 149.606,194.31 165.735,194.31 167.64,196.215 167.64,210.312 168.402,211.074 R43.1
NetR44: U18.29 | length 95.7
  Top Layer w0.254: U18.29 129.909,254.369 131.445,255.905 160.02,255.905 179.705,236.22 179.705,208.788 178.181,207.264 173.812,207.264
NetR44_2: R44.1 R44.2 U11.27 | length 38.6
  Top Layer w0.254: U11.27 148.522,194.251 149.098,193.675 166.37,193.675 168.275,195.58 168.275,206.248 169.291,207.264 R44.1
NetR45: U18.22 | length 58.6
  Top Layer w0.254: U18.22 160.81,248.765 176.53,233.045 176.53,227.33 175.514,226.314 173.812,226.314
NetR45_2: R45.1 R45.2 U11.38 | length 42.4
  Top Layer w0.254: U11.38 164.47,199.903 165.1,200.533 165.1,225.425 165.989,226.314 R45.1
NetR46: U18.18 | length 52.5
  Top Layer w0.254: U18.18 161.54,246.765 175.895,232.41 175.895,230.759 175.26,230.124 173.812,230.124
NetR46_2: R46.1 R46.2 U11.39 | length 45
  Top Layer w0.254: U11.39 163.7,200.403 164.465,201.168 164.465,228.219 166.37,230.124 R46.1
NetR47: U18.30 | length 102.3
  Top Layer w0.254: U18.30 129.409,254.504 131.445,256.54 160.655,256.54 180.34,236.855 180.34,204.978 178.816,203.454 173.812,203.454
NetR47_2: R47.1 R47.2 U11.26 | length 36.7
  Top Layer w0.254: U11.26 148.022,193.608 148.59,193.04 167.005,193.04 168.91,194.945 168.91,202.692 169.672,203.454 R47.1
NetU1_1: U1.1 U3.3 U3.4 | length 25.3
  Top Layer w1.905: v3(175.387,158.496) v3(175.387,153.924) 175.387,147.816 U1.1
  Bottom Layer w1.905: v3(175.387,158.496) v3(175.387,153.924) 175.387,147.816 U1.1
NetU1_2: U1.2 U3.1 U3.2 | length 25.1
  Top Layer w1.905: U1.2 171.692,146.46 172.847,147.614 v3(172.847,153.924) v3(172.847,158.496)
  Bottom Layer w1.905: U1.2 171.692,146.46 172.847,147.614 v3(172.847,153.924) v3(172.847,158.496)
NetU4_1: U4.1 U5.3 U5.4 | length 25.2
  Top Layer w1.905: v3(154.178,158.496) v3(154.178,154.051) 154.178,147.689 U4.1
  Bottom Layer w1.905: v3(154.178,158.496) 154.178,147.658 U4.1@155.436,146.4
NetU4_2: U4.2 U5.1 U5.2 | length 25
  Top Layer w1.905: U4.2 151.638,147.713 v3(151.638,153.924) v3(151.638,158.369)
  Bottom Layer w1.905: U4.2 150.388,146.431 151.638,147.681 v3(151.638,158.369)
NetU6_1: U6.1 U7.3 U7.4 | length 25.3
  Top Layer w1.905: v3(131.572,158.496) v3(131.572,153.924) 131.572,147.816 U6.1
  Bottom Layer w1.905: v3(131.572,158.496) v3(131.572,153.924) 131.572,147.816 U6.1
NetU6_2: U6.2 U7.1 U7.2 | length 25.1
  Top Layer w1.905: U6.2 127.877,146.46 129.032,147.614 v3(129.032,153.924) v3(129.032,158.496)
  Bottom Layer w1.905: U6.2 127.877,146.46 129.032,147.614 v3(129.032,153.924) v3(129.032,158.496)
NetU18_10: U18.10 U20.1 | length 23.9
  Top Layer w0.254: U18.10 130.909,240.82 139.319,232.41 U20.1
NetU18_11: U18.11 U20.2 | length 21.9
  Top Layer w0.254: U18.11 131.41,241.589 138.049,234.95 U20.2
pads on no net: D1.2 D2.2 D3.2 D4.2 D5.2 D6.2 JTAG.6 JTAG.7 R2.1 R33.1 R36.1 RST_FPGA.2 RST_FPGA.3 RST_MCU.1 RST_MCU.4 START.2 START.3 U11.5 U11.8 U11.10 U11.11 U11.12 U11.13 U11.14 U11.17 U11.21 U11.22 U11.24 U11.25 U11.30 U11.41 U11.43 U11.44 U11.45 U11.48 U11.52 U11.61 U11.62 U11.66 U11.78 U11.79 U11.80 U11.81 U11.84 U11.86 U11.87 U11.88 U11.89 U11.90 U11.91 U11.92 U11.93 U11.96 U11.97 U11.98 U11.100 U11.101 U11.102 U11.105 U11.106 U11.110 U11.111 U11.112 U11.113 U11.114 U11.118 U11.119 U11.120 U11.122 U11.123 U11.124 U11.127 U11.130 U11.131 U11.132 U11.134 U11.135 U11.140 U11.141 U18.1 U18.3 U18.4 U18.5 U18.6 U18.8 U18.9 U18.12 U18.14 U18.15 U18.16 U18.17 U18.20 U18.34 U18.39 U18.40 U18.41 U18.42 U18.43 U18.44 U18.46 VA.2 VA.5 VB.2 VB.5 VC.2 VC.5
copper on no net: | length 147.4
  Top Layer w0.254: 142.522,197.58 142.522,189.128 143.662,189.128 144.145,189.611 v1(144.145,190.5) ; 143.022,197.58 143.022,193.528 146.05,190.5 146.05,189.128 147.345,189.128 147.731,189.514 147.731,190.022 v1(147.828,190.119) ; 144.522,197.58 144.535,197.568 144.535,193.285 146.05,191.77 152.527,191.77 153.162,191.135 153.162,189.128 166.345,189.128 172.593,182.88 181.356,182.88
  Bottom Layer w0.254: v1(144.145,190.5) 145.542,190.5 152.019,184.023 182.499,184.023 183.896,185.42 ; v1(147.828,190.119) 149.987,187.96 181.356,187.96

## Polygon pours and split planes (outlines as drawn)
GND on GND Plane (split plane): 205.23,141.988 70.868,141.988 70.868,260.475 205.23,260.475
3.3V on PWR Plane (split plane): 205.23,141.988 70.868,141.988 70.868,260.475 205.23,260.475

## Silkscreen, mask and mechanical layers (free items; w line width, h text height)
Top Overlay:
  text "PA14" at 114.935,259.207 h0.76
  text "G" at 118.491,259.207 h0.76
  text "PA13" at 119.888,259.207 h0.76
  text "+" at 113.411,259.08 h0.76
  text "G" at 153.035,237.109 h0.76
  text "RX" at 153.035,234.569 h0.76
  text "TX" at 153.035,232.029 h0.76
  text "+" at 110.998,223.266 h0.76
  text "G" at 110.998,220.726 h0.76
Mechanical 1:

## Text inside footprints (layer, text, board x,y; h text height)
U11: Top Overlay "*" at 135.001,196.723 h1.27 r90; Mechanical 13 "*" at 135.907,198.222 h1.27 r90
U18: Top Overlay "*" at 126.009,240.97 h1.27 r90; Mechanical 13 "*" at 126.793,243.484 h1.27 r90
VA: Top Overlay "*" at 85.827,199.517 h1.27; Mechanical 13 "*" at 87.554,198.006 h1.27
VB: Top Overlay "*" at 85.827,179.832 h1.27; Mechanical 13 "*" at 87.554,178.321 h1.27
VC: Top Overlay "*" at 85.827,160.147 h1.27; Mechanical 13 "*" at 87.554,158.636 h1.27